# EAGLE board Pro_Micro-3.3V-Panel-v13 (EAGLE 6.5.0), part 1 of 5
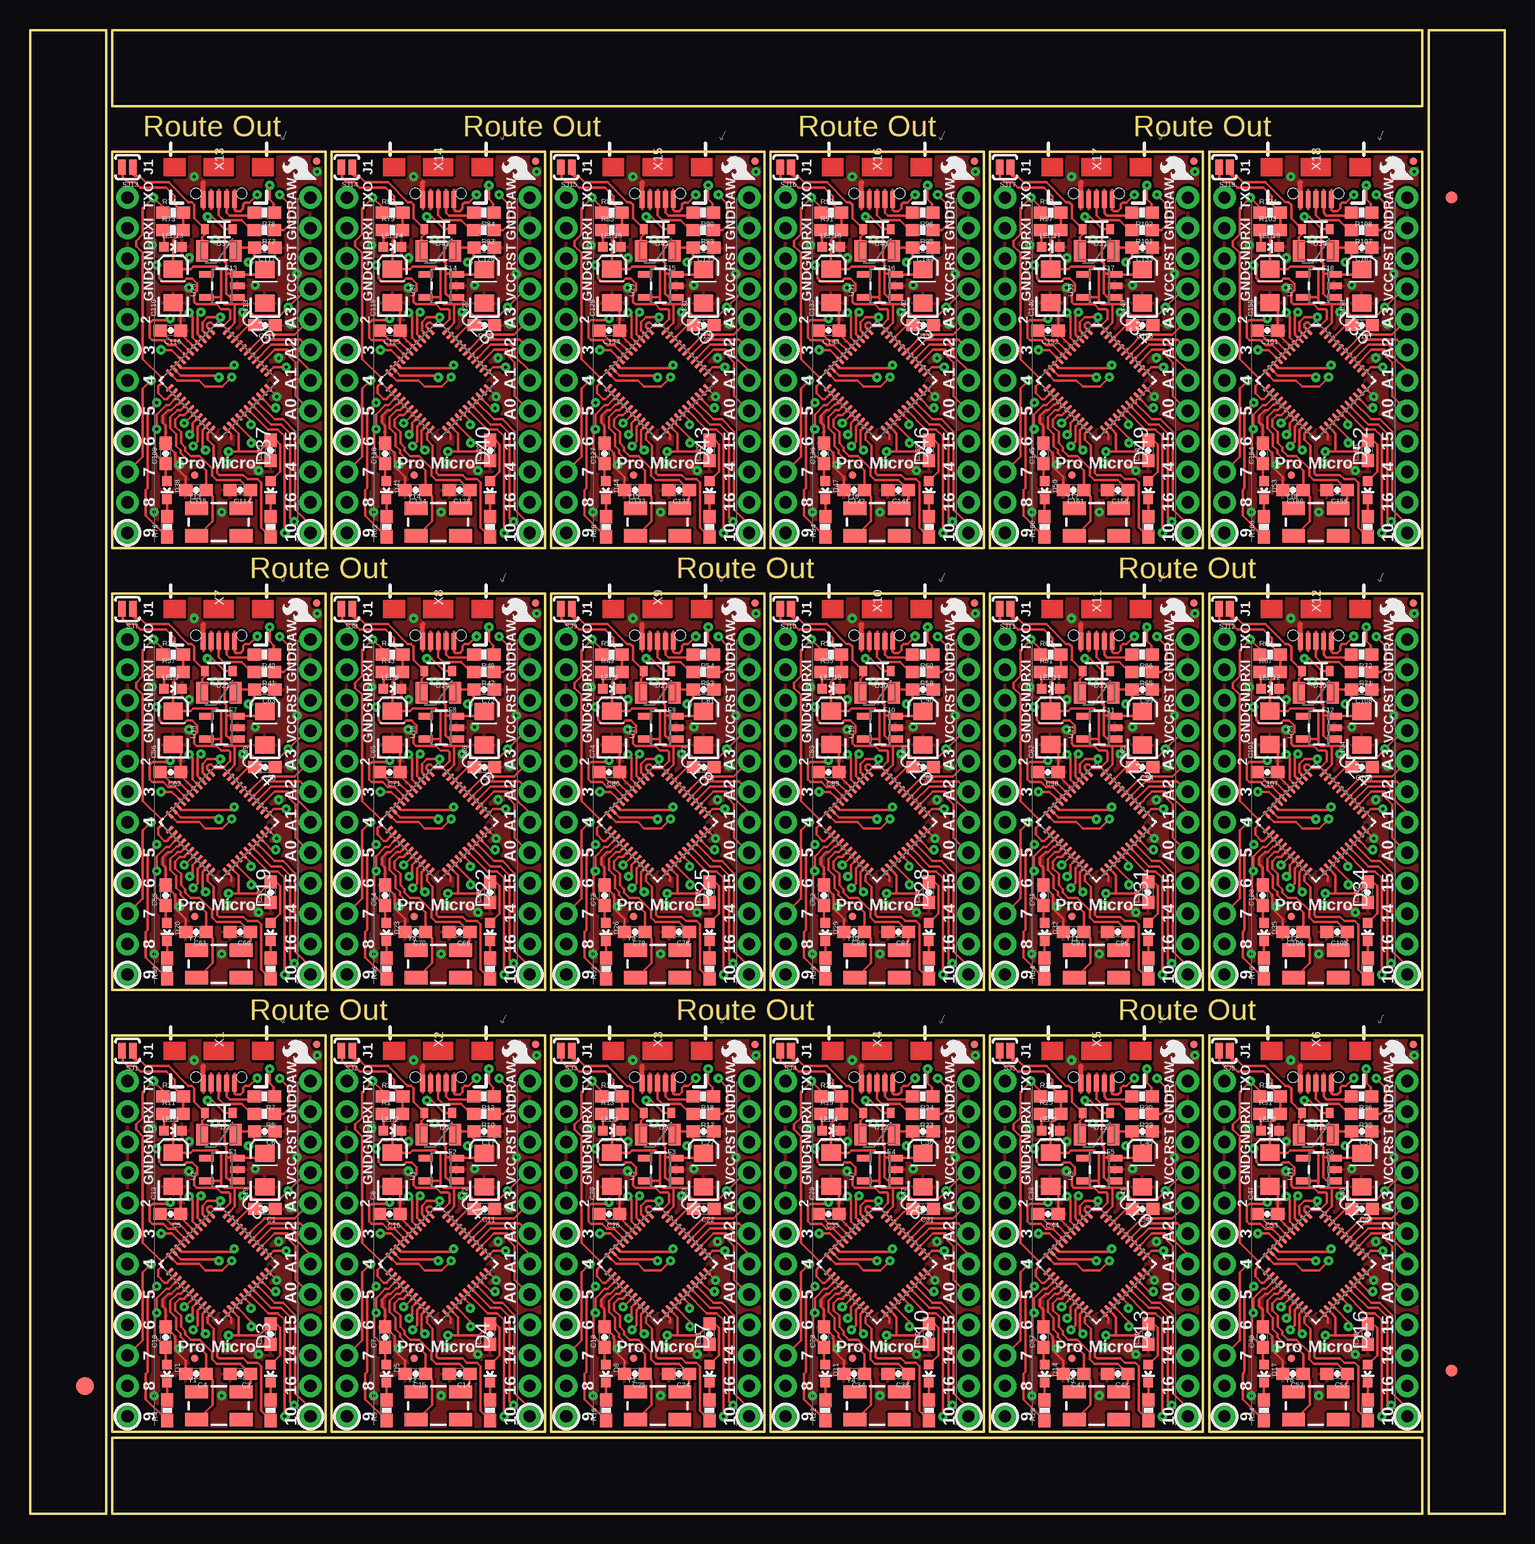
[diagram p0: board, top side]
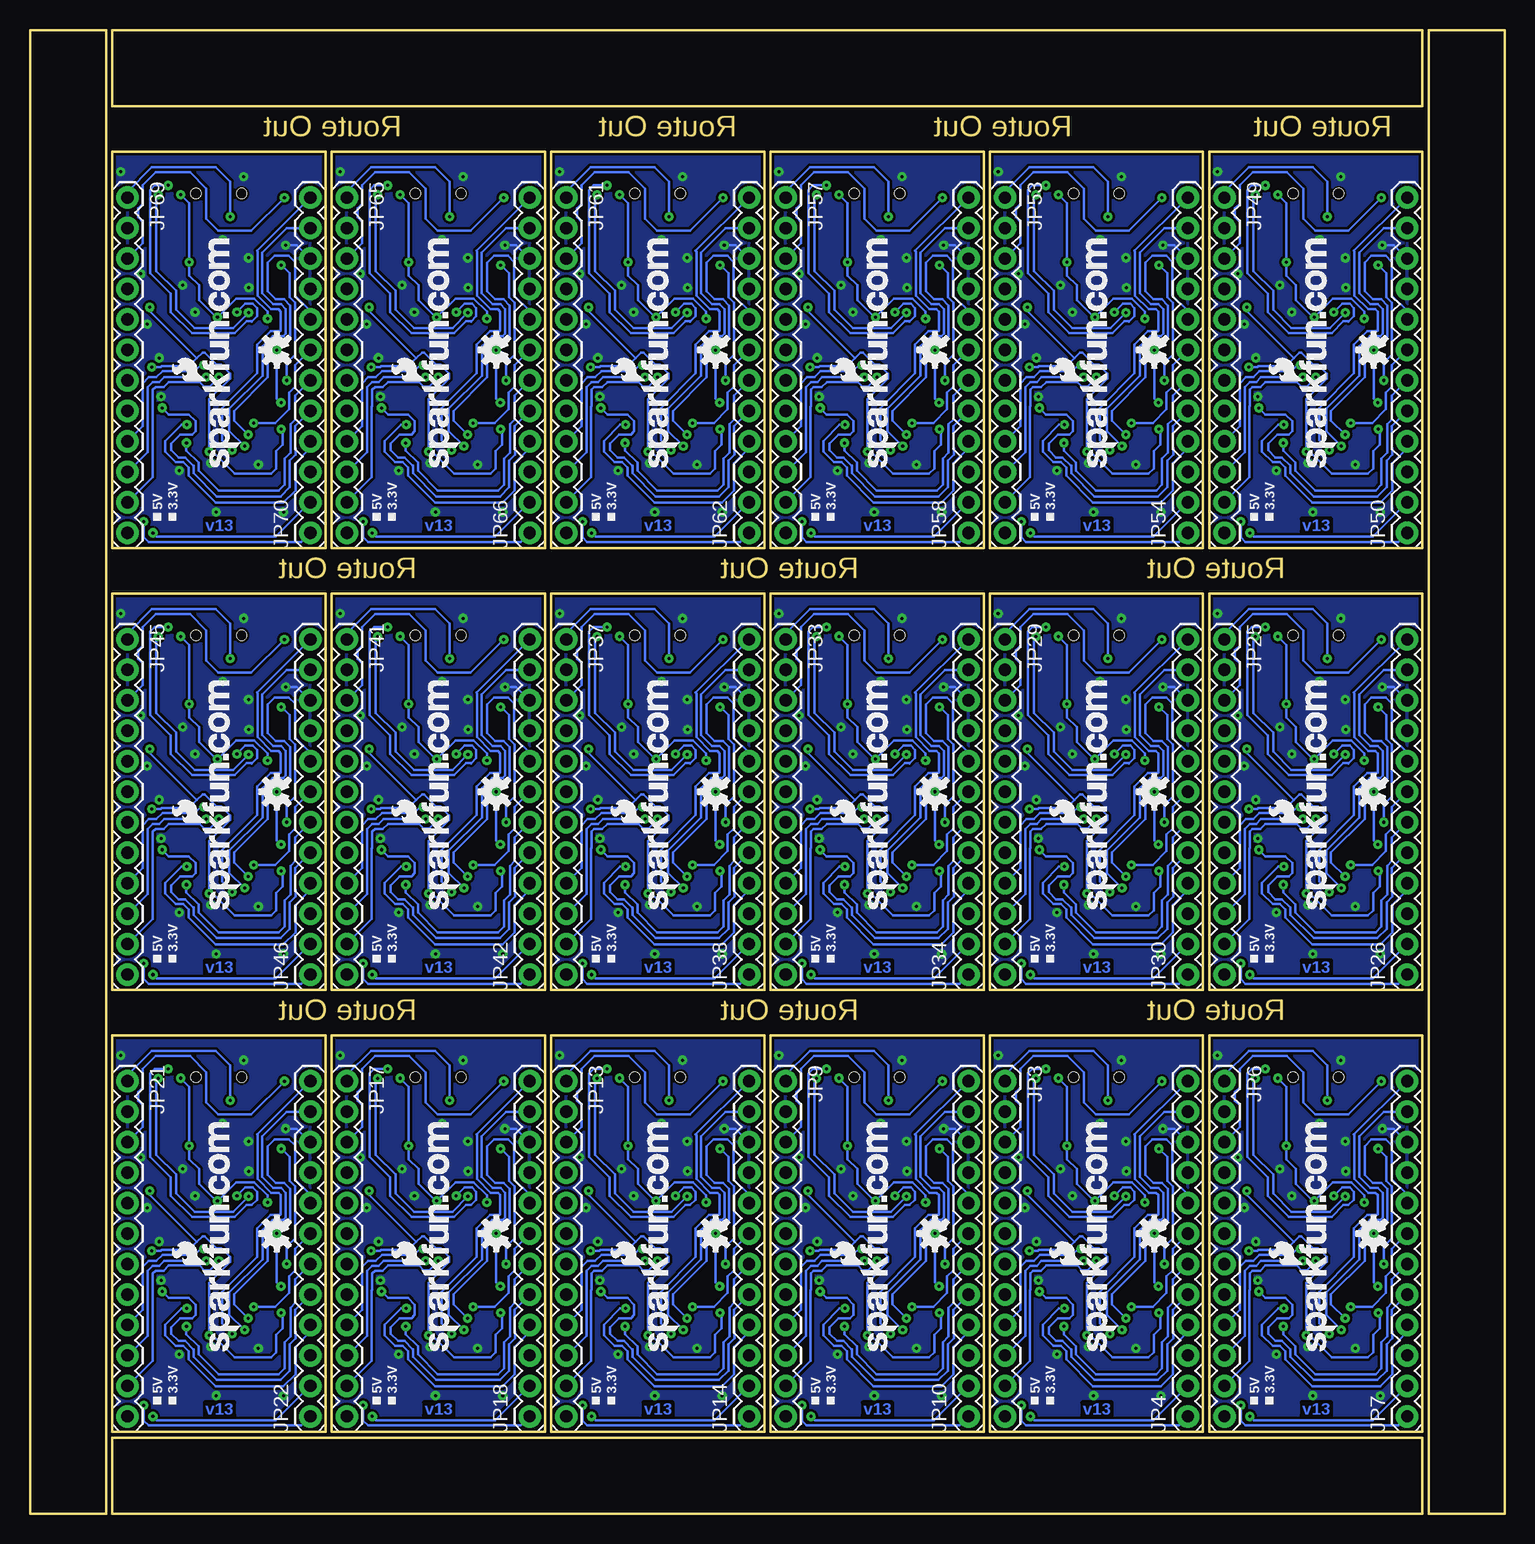
[diagram p1: board, bottom side, seen from below]

Size 122.94 x 123.7 mm. Coordinates in mm from the lower left corner, seen from the top.
Outline: 6.86,39.88 6.86,6.86 24.64,6.86 24.64,39.88 6.86,39.88
Outline: 25.15,39.88 25.15,6.86 42.93,6.86 42.93,39.88 25.15,39.88
Outline: 43.43,39.88 43.43,6.86 61.21,6.86 61.21,39.88 43.43,39.88
Outline: 61.72,39.88 61.72,6.86 79.5,6.86 79.5,39.88 61.72,39.88
Outline: 80.01,39.88 80.01,6.86 97.79,6.86 97.79,39.88 80.01,39.88
Outline: 98.3,39.88 98.3,6.86 116.08,6.86 116.08,39.88 98.3,39.88
Outline: 6.86,76.71 6.86,43.69 24.64,43.69 24.64,76.71 6.86,76.71
Outline: 25.15,76.71 25.15,43.69 42.93,43.69 42.93,76.71 25.15,76.71
Outline: 43.43,76.71 43.43,43.69 61.21,43.69 61.21,76.71 43.43,76.71
Outline: 61.72,76.71 61.72,43.69 79.5,43.69 79.5,76.71 61.72,76.71
Outline: 80.01,76.71 80.01,43.69 97.79,43.69 97.79,76.71 80.01,76.71
Outline: 98.3,76.71 98.3,43.69 116.08,43.69 116.08,76.71 98.3,76.71
Outline: 6.86,113.54 6.86,80.52 24.64,80.52 24.64,113.54 6.86,113.54
Outline: 25.15,113.54 25.15,80.52 42.93,80.52 42.93,113.54 25.15,113.54
Outline: 43.43,113.54 43.43,80.52 61.21,80.52 61.21,113.54 43.43,113.54
Outline: 61.72,113.54 61.72,80.52 79.5,80.52 79.5,113.54 61.72,113.54
Outline: 80.01,113.54 80.01,80.52 97.79,80.52 97.79,113.54 80.01,113.54
Outline: 98.3,113.54 98.3,80.52 116.08,80.52 116.08,113.54 98.3,113.54
Outline: 6.35,0 6.35,123.7 0,123.7 0,0 6.35,0
Outline: 6.86,0 116.08,0 116.08,6.35 6.86,6.35 6.86,0
Outline: 122.94,0 122.94,123.7 116.59,123.7 116.59,0 122.94,0
Outline: 6.86,117.35 116.08,117.35 116.08,123.7 6.86,123.7 6.86,117.35
Copper layers (1*16): Top 0.035mm / dielectric 1.5mm / Bottom 0.035mm
Design rules "SparkFun *": minimum track width 8mil, minimum drill 15mil, track to track 7mil, track to pad 7mil, pad to pad 7mil, via to via 7mil, smd to smd 7mil, copper to edge 7mil, drill to drill 7mil, minimum pad ring 12mil, minimum via ring 10mil, stop-mask expansion 4mil, vias tented up to drill 20mil, thermal gap 10mil
Net classes: 0 default: width 0.203 mm
tRestrict: area 16,16.4 to 16.2,16.6; area 19.9,20.4 to 20,20.5; area 12.3,17.1 to 19.4,24.4; area 34.3,16.4 to 34.5,16.6; area 38.2,20.4 to 38.3,20.5; area 30.6,17.1 to 37.7,24.4; area 52.6,16.4 to 52.8,16.6; area 56.5,20.4 to 56.6,20.5; area 48.9,17.1 to 56,24.4; area 70.9,16.4 to 71.1,16.6; area 74.8,20.4 to 74.9,20.5; area 67.2,17.1 to 74.3,24.4; area 89.2,16.4 to 89.3,16.6; area 93.1,20.4 to 93.2,20.5; area 85.5,17.1 to 92.6,24.4; area 107.4,16.4 to 107.6,16.6; area 111.4,20.4 to 111.4,20.5; area 103.7,17.1 to 110.9,24.4; area 16,53.3 to 16.2,53.4; area 19.9,57.3 to 20,57.3; area 12.3,54 to 19.4,61.3; area 34.3,53.3 to 34.5,53.4; area 38.2,57.3 to 38.3,57.3; area 30.6,54 to 37.7,61.3; area 52.6,53.3 to 52.8,53.4; area 56.5,57.3 to 56.6,57.3; area 48.9,54 to 56,61.3; area 70.9,53.3 to 71.1,53.4; area 74.8,57.3 to 74.9,57.3; area 67.2,54 to 74.3,61.3; area 89.2,53.3 to 89.3,53.4; area 93.1,57.3 to 93.2,57.3; area 85.5,54 to 92.6,61.3; area 107.4,53.3 to 107.6,53.4; area 111.4,57.3 to 111.4,57.3; area 103.7,54 to 110.9,61.3; area 16,90.1 to 16.2,90.2; area 19.9,94.1 to 20,94.2; area 12.3,90.8 to 19.4,98.1; area 34.3,90.1 to 34.5,90.2; area 38.2,94.1 to 38.3,94.2; area 30.6,90.8 to 37.7,98.1; area 52.6,90.1 to 52.8,90.2; area 56.5,94.1 to 56.6,94.2; area 48.9,90.8 to 56,98.1; area 70.9,90.1 to 71.1,90.2; area 74.8,94.1 to 74.9,94.2; area 67.2,90.8 to 74.3,98.1; area 89.2,90.1 to 89.3,90.2; area 93.1,94.1 to 93.2,94.2; area 85.5,90.8 to 92.6,98.1; area 107.4,90.1 to 107.6,90.2; area 111.4,94.1 to 111.4,94.2; area 103.7,90.8 to 110.9,98.1

## Footprints (pad centres in the part's own frame; a part is rotated, then mirrored left to right if it is on the bottom)
0603-CAP = smd 1.1 x 1: 1 -0.85,0; 2 0.85,0
EIA3216 = smd 1.4 x 1.6: A 1.4,0; C -1.4,0
LED-0603 = smd 0.8 x 0.8: A 0,-0.75; C 0,0.75
SOD-323 = smd 0.63 x 0.83: 1 -1.15,0; 2 1.15,0
FIDUCIAL-1.5X3 = smd 1.5 x 1.5: 1 0,0
FIDUCIAL-1X2 = smd 1 x 1: 1 0,0
PTC-1206 = smd 1 x 1.8: 1 -1.4,0; 2 1.4,0
MICRO-FIDUCIAL = smd 0.635 x 0.635: 1 0,0
1X12 = drill 1.016 pad 1.88: 1 0,0; 2 2.54,0; 3 5.08,0; 4 7.62,0; 5 10.16,0; 6 12.7,0; 7 15.24,0; 8 17.78,0; 9 20.32,0; 10 22.86,0; 11 25.4,0; 12 27.94,0
0603-RES = smd 1.1 x 1: 1 -0.85,0; 2 0.85,0
SJ_2S-NO = smd 0.635 x 1.27: 1 -0.45,0; 2 0.45,0
SOT23-5 = smd 0.55 x 1.2: 1 -0.95,-1.3; 2 0,-1.3; 3 0.95,-1.3; 4 0.95,1.3; 5 -0.95,1.3
QFN-44-NOPAD_1:1-LESS_PASTE = smd 0.8 x 0.3: 1 -3.337,2.458; 2 -3.337,1.958; 3 -3.337,1.479; 4 -3.337,0.979; 5 -3.337,0.5; 6 -3.337,0; 7 -3.337,-0.5; 8 -3.337,-0.979; 9 -3.337,-1.479; 10 -3.337,-1.958; 11 -3.337,-2.458; 23 3.337,-2.458; 24 3.337,-1.958; 25 3.337,-1.479; 26 3.337,-0.979; 27 3.337,-0.5; 28 3.337,0; 29 3.337,0.5; 30 3.337,0.979; 31 3.337,1.479; 32 3.337,1.958; 33 3.337,2.458 | smd 0.3 x 0.8: 12 -2.458,-3.337; 13 -1.958,-3.337; 14 -1.479,-3.337; 15 -0.979,-3.337; 16 -0.5,-3.337; 17 0,-3.337; 18 0.5,-3.337; 19 0.979,-3.337; 20 1.479,-3.337; 21 1.958,-3.337; 22 2.458,-3.337; 34 2.458,3.337; 35 1.958,3.337; 36 1.479,3.337; 37 0.979,3.337; 38 0.5,3.337; 39 0,3.337; 40 -0.5,3.337; 41 -0.979,3.337; 42 -1.479,3.337; 43 -1.958,3.337; 44 -2.458,3.337
USB-AB-MICRO-SMD-V03-IN&OUT = smd 1.4 x 0.4: D+1 2.7,0; D-1 2.7,0.65; GND1 2.7,-1.3; ID1 2.7,-0.65; VBUS1 2.7,1.3 | hole 0.85: 2.2,1.9; 2.2,-1.9
CRYSTAL-SMD-5X3 = smd 1.9 x 1.1: 1 -1.85,-1.15; 2 1.85,-1.15; 3 1.85,1.15; 4 -1.85,1.15

## Placement (x,y rotation side)
C1  0.1uF  [0603-CAP]  19.6,25.42 180 top
C2  22pF  [0603-CAP]  17.53,11.68 180 top
C3  0.1uF  [0603-CAP]  20.07,14.99 90 top
C4  22pF  [0603-CAP]  13.84,11.68 180 top
C5  1uF  [0603-CAP]  11.71,24.99 180 top
C6  1uF  [0603-CAP]  19.57,31.89 180 top
C7  1uF  [0603-CAP]  29.6,14.73 90 top
C8  10uF  [EIA3216]  30.21,28.71 90 top
C9  0.1uF  [0603-CAP]  38.35,14.99 90 top
C10  1uF  [0603-CAP]  11.32,14.73 90 top
C11  0.1uF  [0603-CAP]  37.88,25.42 180 top
C12  10uF  [EIA3216]  37.87,28.66 90 top
C13  10uF  [EIA3216]  11.93,28.71 90 top
C14  22pF  [0603-CAP]  35.81,11.68 180 top
C15  22pF  [0603-CAP]  32.13,11.68 180 top
C16  1uF  [0603-CAP]  30,24.99 180 top
C17  1uF  [0603-CAP]  37.86,31.89 180 top
C18  1uF  [0603-CAP]  47.89,14.73 90 top
C19  10uF  [EIA3216]  19.58,28.66 90 top
C20  10uF  [EIA3216]  48.5,28.71 90 top
C21  0.1uF  [0603-CAP]  56.64,14.99 90 top
C22  0.1uF  [0603-CAP]  56.17,25.42 180 top
C23  10uF  [EIA3216]  56.16,28.66 90 top
C24  22pF  [0603-CAP]  54.1,11.68 180 top
C25  22pF  [0603-CAP]  50.42,11.68 180 top
C26  1uF  [0603-CAP]  48.29,24.99 180 top
C27  1uF  [0603-CAP]  56.15,31.89 180 top
C28  1uF  [0603-CAP]  66.18,14.73 90 top
C29  10uF  [EIA3216]  66.79,28.71 90 top
C30  0.1uF  [0603-CAP]  74.93,14.99 90 top
C31  0.1uF  [0603-CAP]  74.46,25.42 180 top
C32  10uF  [EIA3216]  74.44,28.66 90 top
C33  22pF  [0603-CAP]  72.39,11.68 180 top
C34  22pF  [0603-CAP]  68.71,11.68 180 top
C35  1uF  [0603-CAP]  66.58,24.99 180 top
C36  1uF  [0603-CAP]  74.43,31.89 180 top
C37  1uF  [0603-CAP]  84.47,14.73 90 top
C38  10uF  [EIA3216]  85.08,28.71 90 top
C39  0.1uF  [0603-CAP]  93.22,14.99 90 top
C40  0.1uF  [0603-CAP]  92.75,25.42 180 top
C41  10uF  [EIA3216]  92.73,28.66 90 top
C42  22pF  [0603-CAP]  90.68,11.68 180 top
C43  22pF  [0603-CAP]  87,11.68 180 top
C44  1uF  [0603-CAP]  84.86,24.99 180 top
C45  1uF  [0603-CAP]  92.72,31.89 180 top
C46  1uF  [0603-CAP]  102.76,14.73 90 top
C47  10uF  [EIA3216]  103.37,28.71 90 top
C48  0.1uF  [0603-CAP]  111.51,14.99 90 top
C49  0.1uF  [0603-CAP]  111.04,25.42 180 top
C50  10uF  [EIA3216]  111.02,28.66 90 top
C51  22pF  [0603-CAP]  108.97,11.68 180 top
C52  22pF  [0603-CAP]  105.28,11.68 180 top
C53  1uF  [0603-CAP]  103.15,24.99 180 top
C54  1uF  [0603-CAP]  111.01,31.89 180 top
C55  1uF  [0603-CAP]  11.32,51.56 90 top
C56  10uF  [EIA3216]  11.93,65.54 90 top
C57  0.1uF  [0603-CAP]  20.07,51.82 90 top
C58  0.1uF  [0603-CAP]  19.6,62.25 180 top
C59  10uF  [EIA3216]  19.58,65.49 90 top
C60  22pF  [0603-CAP]  17.53,48.51 180 top
C61  22pF  [0603-CAP]  13.84,48.51 180 top
C62  1uF  [0603-CAP]  11.71,61.82 180 top
C63  1uF  [0603-CAP]  19.57,68.72 180 top
C64  1uF  [0603-CAP]  29.6,51.56 90 top
C65  10uF  [EIA3216]  30.21,65.54 90 top
C66  0.1uF  [0603-CAP]  38.35,51.82 90 top
C67  0.1uF  [0603-CAP]  37.88,62.25 180 top
C68  10uF  [EIA3216]  37.87,65.49 90 top
C69  22pF  [0603-CAP]  35.81,48.51 180 top
C70  22pF  [0603-CAP]  32.13,48.51 180 top
C71  1uF  [0603-CAP]  30,61.82 180 top
C72  1uF  [0603-CAP]  37.86,68.72 180 top
C73  1uF  [0603-CAP]  47.89,51.56 90 top
C74  10uF  [EIA3216]  48.5,65.54 90 top
C75  0.1uF  [0603-CAP]  56.64,51.82 90 top
C76  0.1uF  [0603-CAP]  56.17,62.25 180 top
C77  10uF  [EIA3216]  56.16,65.49 90 top
C78  22pF  [0603-CAP]  54.1,48.51 180 top
C79  22pF  [0603-CAP]  50.42,48.51 180 top
C80  1uF  [0603-CAP]  48.29,61.82 180 top
C81  1uF  [0603-CAP]  56.15,68.72 180 top
C82  1uF  [0603-CAP]  66.18,51.56 90 top
C83  10uF  [EIA3216]  66.79,65.54 90 top
C84  0.1uF  [0603-CAP]  74.93,51.82 90 top
C85  0.1uF  [0603-CAP]  74.46,62.25 180 top
C86  10uF  [EIA3216]  74.44,65.49 90 top
C87  22pF  [0603-CAP]  72.39,48.51 180 top
C88  22pF  [0603-CAP]  68.71,48.51 180 top
C89  1uF  [0603-CAP]  66.58,61.82 180 top
C90  1uF  [0603-CAP]  74.43,68.72 180 top
C91  1uF  [0603-CAP]  84.47,51.56 90 top
C92  10uF  [EIA3216]  85.08,65.54 90 top
C93  0.1uF  [0603-CAP]  93.22,51.82 90 top
C94  0.1uF  [0603-CAP]  92.75,62.25 180 top
C95  10uF  [EIA3216]  92.73,65.49 90 top
C96  22pF  [0603-CAP]  90.68,48.51 180 top
C97  22pF  [0603-CAP]  87,48.51 180 top
C98  1uF  [0603-CAP]  84.86,61.82 180 top
C99  1uF  [0603-CAP]  92.72,68.72 180 top
C100  1uF  [0603-CAP]  102.76,51.56 90 top
C101  10uF  [EIA3216]  103.37,65.54 90 top
C102  0.1uF  [0603-CAP]  111.51,51.82 90 top
C103  0.1uF  [0603-CAP]  111.04,62.25 180 top
C104  10uF  [EIA3216]  111.02,65.49 90 top
C105  22pF  [0603-CAP]  108.97,48.51 180 top
C106  22pF  [0603-CAP]  105.28,48.51 180 top
C107  1uF  [0603-CAP]  103.15,61.82 180 top
C108  1uF  [0603-CAP]  111.01,68.72 180 top
C109  1uF  [0603-CAP]  11.32,88.39 90 top
C110  10uF  [EIA3216]  11.93,102.37 90 top
C111  0.1uF  [0603-CAP]  20.07,88.65 90 top
C112  0.1uF  [0603-CAP]  19.6,99.08 180 top
C113  10uF  [EIA3216]  19.58,102.32 90 top
C114  22pF  [0603-CAP]  17.53,85.34 180 top
C115  22pF  [0603-CAP]  13.84,85.34 180 top
C116  1uF  [0603-CAP]  11.71,98.65 180 top
C117  1uF  [0603-CAP]  19.57,105.55 180 top
C118  1uF  [0603-CAP]  29.6,88.39 90 top
C119  10uF  [EIA3216]  30.21,102.37 90 top
C120  0.1uF  [0603-CAP]  38.35,88.65 90 top
C121  0.1uF  [0603-CAP]  37.88,99.08 180 top
C122  10uF  [EIA3216]  37.87,102.32 90 top
C123  22pF  [0603-CAP]  35.81,85.34 180 top
C124  22pF  [0603-CAP]  32.13,85.34 180 top
C125  1uF  [0603-CAP]  30,98.65 180 top
C126  1uF  [0603-CAP]  37.86,105.55 180 top
C127  1uF  [0603-CAP]  47.89,88.39 90 top
C128  10uF  [EIA3216]  48.5,102.37 90 top
C129  0.1uF  [0603-CAP]  56.64,88.65 90 top
C130  0.1uF  [0603-CAP]  56.17,99.08 180 top
C131  10uF  [EIA3216]  56.16,102.32 90 top
C132  22pF  [0603-CAP]  54.1,85.34 180 top
C133  22pF  [0603-CAP]  50.42,85.34 180 top
C134  1uF  [0603-CAP]  48.29,98.65 180 top
C135  1uF  [0603-CAP]  56.15,105.55 180 top
C136  1uF  [0603-CAP]  66.18,88.39 90 top
C137  10uF  [EIA3216]  66.79,102.37 90 top
C138  0.1uF  [0603-CAP]  74.93,88.65 90 top
C139  0.1uF  [0603-CAP]  74.46,99.08 180 top
C140  10uF  [EIA3216]  74.44,102.32 90 top
C141  22pF  [0603-CAP]  72.39,85.34 180 top
C142  22pF  [0603-CAP]  68.71,85.34 180 top
C143  1uF  [0603-CAP]  66.58,98.65 180 top
C144  1uF  [0603-CAP]  74.43,105.55 180 top
C145  1uF  [0603-CAP]  84.47,88.39 90 top
C146  10uF  [EIA3216]  85.08,102.37 90 top
C147  0.1uF  [0603-CAP]  93.22,88.65 90 top
C148  0.1uF  [0603-CAP]  92.75,99.08 180 top
C149  10uF  [EIA3216]  92.73,102.32 90 top
C150  22pF  [0603-CAP]  90.68,85.34 180 top
C151  22pF  [0603-CAP]  87,85.34 180 top
C152  1uF  [0603-CAP]  84.86,98.65 180 top
C153  1uF  [0603-CAP]  92.72,105.55 180 top
C154  1uF  [0603-CAP]  102.76,88.39 90 top
C155  10uF  [EIA3216]  103.37,102.37 90 top
C156  0.1uF  [0603-CAP]  111.51,88.65 90 top
C157  0.1uF  [0603-CAP]  111.04,99.08 180 top
C158  10uF  [EIA3216]  111.02,102.32 90 top
C159  22pF  [0603-CAP]  108.97,85.34 180 top
C160  22pF  [0603-CAP]  105.28,85.34 180 top
C161  1uF  [0603-CAP]  103.15,98.65 180 top
C162  1uF  [0603-CAP]  111.01,105.55 180 top
D1  Yellow  [LED-0603]  11.43,11.68 180 top
D2  [SOD-323]  15.75,33.43 180 top
D3  Green  [LED-0603]  20.07,11.68 180 top
D4  Green  [LED-0603]  38.35,11.68 180 top
D5  Yellow  [LED-0603]  29.72,11.68 180 top
D6  [SOD-323]  34.04,33.43 180 top
D7  Green  [LED-0603]  56.64,11.68 180 top
D8  Yellow  [LED-0603]  48.01,11.68 180 top
D9  [SOD-323]  52.32,33.43 180 top
D10  Green  [LED-0603]  74.93,11.68 180 top
D11  Yellow  [LED-0603]  66.29,11.68 180 top
D12  [SOD-323]  70.61,33.43 180 top
D13  Green  [LED-0603]  93.22,11.68 180 top
D14  Yellow  [LED-0603]  84.58,11.68 180 top
D15  [SOD-323]  88.9,33.43 180 top
D16  Green  [LED-0603]  111.51,11.68 180 top
D17  Yellow  [LED-0603]  102.87,11.68 180 top
D18  [SOD-323]  107.19,33.43 180 top
D19  Green  [LED-0603]  20.07,48.51 180 top
D20  Yellow  [LED-0603]  11.43,48.51 180 top
D21  [SOD-323]  15.75,70.26 180 top
D22  Green  [LED-0603]  38.35,48.51 180 top
D23  Yellow  [LED-0603]  29.72,48.51 180 top
D24  [SOD-323]  34.04,70.26 180 top
D25  Green  [LED-0603]  56.64,48.51 180 top
D26  Yellow  [LED-0603]  48.01,48.51 180 top
D27  [SOD-323]  52.32,70.26 180 top
D28  Green  [LED-0603]  74.93,48.51 180 top
D29  Yellow  [LED-0603]  66.29,48.51 180 top
D30  [SOD-323]  70.61,70.26 180 top
D31  Green  [LED-0603]  93.22,48.51 180 top
D32  Yellow  [LED-0603]  84.58,48.51 180 top
D33  [SOD-323]  88.9,70.26 180 top
D34  Green  [LED-0603]  111.51,48.51 180 top
D35  Yellow  [LED-0603]  102.87,48.51 180 top
D36  [SOD-323]  107.19,70.26 180 top
D37  Green  [LED-0603]  20.07,85.34 180 top
D38  Yellow  [LED-0603]  11.43,85.34 180 top
D39  [SOD-323]  15.75,107.09 180 top
D40  Green  [LED-0603]  38.35,85.34 180 top
D41  Yellow  [LED-0603]  29.72,85.34 180 top
D42  [SOD-323]  34.04,107.09 180 top
D43  Green  [LED-0603]  56.64,85.34 180 top
D44  Yellow  [LED-0603]  48.01,85.34 180 top
D45  [SOD-323]  52.32,107.09 180 top
D46  Green  [LED-0603]  74.93,85.34 180 top
D47  Yellow  [LED-0603]  66.29,85.34 180 top
D48  [SOD-323]  70.61,107.09 180 top
D49  Green  [LED-0603]  93.22,85.34 180 top
D50  Yellow  [LED-0603]  84.58,85.34 180 top
D51  [SOD-323]  88.9,107.09 180 top
D52  Green  [LED-0603]  111.51,85.34 180 top
D53  Yellow  [LED-0603]  102.87,85.34 180 top
D54  [SOD-323]  107.19,107.09 180 top
E$1  [FIDUCIAL-1.5X3]  4.57,10.67 0 top
E$4  [FIDUCIAL-1X2]  118.49,11.94 0 top
E$8  [FIDUCIAL-1X2]  118.49,109.73 180 top
F1  500mA  [PTC-1206]  15.75,31.62 180 top
F2  500mA  [PTC-1206]  34.04,31.62 180 top
F3  500mA  [PTC-1206]  52.32,31.62 180 top
F4  500mA  [PTC-1206]  70.61,31.62 180 top
F5  500mA  [PTC-1206]  88.9,31.62 180 top
F6  500mA  [PTC-1206]  107.19,31.62 180 top
F7  500mA  [PTC-1206]  15.75,68.45 180 top
F8  500mA  [PTC-1206]  34.04,68.45 180 top
F9  500mA  [PTC-1206]  52.32,68.45 180 top
F10  500mA  [PTC-1206]  70.61,68.45 180 top
F11  500mA  [PTC-1206]  88.9,68.45 180 top
F12  500mA  [PTC-1206]  107.19,68.45 180 top
F13  500mA  [PTC-1206]  15.75,105.28 180 top
F14  500mA  [PTC-1206]  34.04,105.28 180 top
F15  500mA  [PTC-1206]  52.32,105.28 180 top
F16  500mA  [PTC-1206]  70.61,105.28 180 top
F17  500mA  [PTC-1206]  88.9,105.28 180 top
F18  500mA  [PTC-1206]  107.19,105.28 180 top
JP1  FIDUCIALUFIDUCIAL  [MICRO-FIDUCIAL]  13.72,12.95 0 top
JP2  FIDUCIALUFIDUCIAL  [MICRO-FIDUCIAL]  23.88,39.12 0 top
JP3  [1X12]  41.66,36.07 270 bottom
JP4  [1X12]  26.42,8.13 90 bottom
JP5  FIDUCIALUFIDUCIAL  [MICRO-FIDUCIAL]  32,12.95 0 top
JP6  [1X12]  23.37,36.07 270 bottom
JP7  [1X12]  8.13,8.13 90 bottom
JP8  FIDUCIALUFIDUCIAL  [MICRO-FIDUCIAL]  42.16,39.12 0 top
JP9  [1X12]  59.94,36.07 270 bottom
JP10  [1X12]  44.7,8.13 90 bottom
JP11  FIDUCIALUFIDUCIAL  [MICRO-FIDUCIAL]  50.29,12.95 0 top
JP12  FIDUCIALUFIDUCIAL  [MICRO-FIDUCIAL]  60.45,39.12 0 top
JP13  [1X12]  78.23,36.07 270 bottom
JP14  [1X12]  62.99,8.13 90 bottom
JP15  FIDUCIALUFIDUCIAL  [MICRO-FIDUCIAL]  68.58,12.95 0 top
JP16  FIDUCIALUFIDUCIAL  [MICRO-FIDUCIAL]  78.74,39.12 0 top
JP17  [1X12]  96.52,36.07 270 bottom
JP18  [1X12]  81.28,8.13 90 bottom
JP19  FIDUCIALUFIDUCIAL  [MICRO-FIDUCIAL]  86.87,12.95 0 top
JP20  FIDUCIALUFIDUCIAL  [MICRO-FIDUCIAL]  97.03,39.12 0 top
JP21  [1X12]  114.81,36.07 270 bottom
JP22  [1X12]  99.57,8.13 90 bottom
JP23  FIDUCIALUFIDUCIAL  [MICRO-FIDUCIAL]  105.16,12.95 0 top
JP24  FIDUCIALUFIDUCIAL  [MICRO-FIDUCIAL]  115.32,39.12 0 top
JP25  [1X12]  23.37,72.9 270 bottom
JP26  [1X12]  8.13,44.96 90 bottom
JP27  FIDUCIALUFIDUCIAL  [MICRO-FIDUCIAL]  13.72,49.78 0 top
JP28  FIDUCIALUFIDUCIAL  [MICRO-FIDUCIAL]  23.88,75.95 0 top
JP29  [1X12]  41.66,72.9 270 bottom
JP30  [1X12]  26.42,44.96 90 bottom
JP31  FIDUCIALUFIDUCIAL  [MICRO-FIDUCIAL]  32,49.78 0 top
JP32  FIDUCIALUFIDUCIAL  [MICRO-FIDUCIAL]  42.16,75.95 0 top
JP33  [1X12]  59.94,72.9 270 bottom
JP34  [1X12]  44.7,44.96 90 bottom
JP35  FIDUCIALUFIDUCIAL  [MICRO-FIDUCIAL]  50.29,49.78 0 top
JP36  FIDUCIALUFIDUCIAL  [MICRO-FIDUCIAL]  60.45,75.95 0 top
JP37  [1X12]  78.23,72.9 270 bottom
JP38  [1X12]  62.99,44.96 90 bottom
JP39  FIDUCIALUFIDUCIAL  [MICRO-FIDUCIAL]  68.58,49.78 0 top
JP40  FIDUCIALUFIDUCIAL  [MICRO-FIDUCIAL]  78.74,75.95 0 top
JP41  [1X12]  96.52,72.9 270 bottom
JP42  [1X12]  81.28,44.96 90 bottom
JP43  FIDUCIALUFIDUCIAL  [MICRO-FIDUCIAL]  86.87,49.78 0 top
JP44  FIDUCIALUFIDUCIAL  [MICRO-FIDUCIAL]  97.03,75.95 0 top
JP45  [1X12]  114.81,72.9 270 bottom
JP46  [1X12]  99.57,44.96 90 bottom
JP47  FIDUCIALUFIDUCIAL  [MICRO-FIDUCIAL]  105.16,49.78 0 top
JP48  FIDUCIALUFIDUCIAL  [MICRO-FIDUCIAL]  115.32,75.95 0 top
JP49  [1X12]  23.37,109.73 270 bottom
JP50  [1X12]  8.13,81.79 90 bottom
JP51  FIDUCIALUFIDUCIAL  [MICRO-FIDUCIAL]  13.72,86.61 0 top
JP52  FIDUCIALUFIDUCIAL  [MICRO-FIDUCIAL]  23.88,112.78 0 top
JP53  [1X12]  41.66,109.73 270 bottom
JP54  [1X12]  26.42,81.79 90 bottom
JP55  FIDUCIALUFIDUCIAL  [MICRO-FIDUCIAL]  32,86.61 0 top
JP56  FIDUCIALUFIDUCIAL  [MICRO-FIDUCIAL]  42.16,112.78 0 top
JP57  [1X12]  59.94,109.73 270 bottom
JP58  [1X12]  44.7,81.79 90 bottom
JP59  FIDUCIALUFIDUCIAL  [MICRO-FIDUCIAL]  50.29,86.61 0 top
JP60  FIDUCIALUFIDUCIAL  [MICRO-FIDUCIAL]  60.45,112.78 0 top
JP61  [1X12]  78.23,109.73 270 bottom
JP62  [1X12]  62.99,81.79 90 bottom
JP63  FIDUCIALUFIDUCIAL  [MICRO-FIDUCIAL]  68.58,86.61 0 top
JP64  FIDUCIALUFIDUCIAL  [MICRO-FIDUCIAL]  78.74,112.78 0 top
JP65  [1X12]  96.52,109.73 270 bottom
JP66  [1X12]  81.28,81.79 90 bottom
JP67  FIDUCIALUFIDUCIAL  [MICRO-FIDUCIAL]  86.87,86.61 0 top
JP68  FIDUCIALUFIDUCIAL  [MICRO-FIDUCIAL]  97.03,112.78 0 top
JP69  [1X12]  114.81,109.73 270 bottom
JP70  [1X12]  99.57,81.79 90 bottom
JP71  FIDUCIALUFIDUCIAL  [MICRO-FIDUCIAL]  105.16,86.61 0 top
JP72  FIDUCIALUFIDUCIAL  [MICRO-FIDUCIAL]  115.32,112.78 0 top
LED1  Red  [LED-0603]  11.93,31.96 270 top
LED2  Red  [LED-0603]  30.21,31.96 270 top
LED3  Red  [LED-0603]  48.5,31.96 270 top
LED4  Red  [LED-0603]  66.79,31.96 270 top
LED5  Red  [LED-0603]  85.08,31.96 270 top
LED6  Red  [LED-0603]  103.37,31.96 270 top
LED7  Red  [LED-0603]  11.93,68.79 270 top
LED8  Red  [LED-0603]  30.21,68.79 270 top
LED9  Red  [LED-0603]  48.5,68.79 270 top
LED10  Red  [LED-0603]  66.79,68.79 270 top
LED11  Red  [LED-0603]  85.08,68.79 270 top
LED12  Red  [LED-0603]  103.37,68.79 270 top
LED13  Red  [LED-0603]  11.93,105.62 270 top
LED14  Red  [LED-0603]  30.21,105.62 270 top
LED15  Red  [LED-0603]  48.5,105.62 270 top
LED16  Red  [LED-0603]  66.79,105.62 270 top
LED17  Red  [LED-0603]  85.08,105.62 270 top
LED18  Red  [LED-0603]  103.37,105.62 270 top
R1  1K  [0603-RES]  30.21,33.36 0 top
R2  10K  [0603-RES]  11.94,34.8 0 top
R3  10K  [0603-RES]  30.23,34.8 0 top
R4  330  [0603-RES]  11.43,8.64 90 top
R5  22  [0603-RES]  19.56,33.35 180 top
R6  330  [0603-RES]  20.07,8.64 90 top
R7  22  [0603-RES]  19.56,34.8 180 top
R8  330  [0603-RES]  38.35,8.64 90 top
R9  330  [0603-RES]  29.72,8.64 90 top
R10  22  [0603-RES]  37.85,33.35 180 top
R11  1K  [0603-RES]  11.93,33.36 0 top
R12  22  [0603-RES]  37.85,34.8 180 top
R13  1K  [0603-RES]  48.5,33.36 0 top
R14  10K  [0603-RES]  48.51,34.8 0 top
R15  330  [0603-RES]  56.64,8.64 90 top
R16  330  [0603-RES]  48.01,8.64 90 top
R17  22  [0603-RES]  56.13,33.35 180 top
R18  22  [0603-RES]  56.13,34.8 180 top
R19  1K  [0603-RES]  66.79,33.36 0 top
R20  10K  [0603-RES]  66.8,34.8 0 top
R21  330  [0603-RES]  74.93,8.64 90 top
R22  330  [0603-RES]  66.29,8.64 90 top
R23  22  [0603-RES]  74.42,33.35 180 top
R24  22  [0603-RES]  74.42,34.8 180 top
R25  1K  [0603-RES]  85.08,33.36 0 top
R26  10K  [0603-RES]  85.09,34.8 0 top
R27  330  [0603-RES]  93.22,8.64 90 top
R28  330  [0603-RES]  84.58,8.64 90 top
R29  22  [0603-RES]  92.71,33.35 180 top
R30  22  [0603-RES]  92.71,34.8 180 top
R31  1K  [0603-RES]  103.37,33.36 0 top
R32  10K  [0603-RES]  103.38,34.8 0 top
R33  330  [0603-RES]  111.51,8.64 90 top
R34  330  [0603-RES]  102.87,8.64 90 top
R35  22  [0603-RES]  111,33.35 180 top
R36  22  [0603-RES]  111,34.8 180 top
R37  1K  [0603-RES]  11.93,70.19 0 top
R38  10K  [0603-RES]  11.94,71.63 0 top
R39  330  [0603-RES]  20.07,45.47 90 top
R40  330  [0603-RES]  11.43,45.47 90 top
R41  22  [0603-RES]  19.56,70.18 180 top
R42  22  [0603-RES]  19.56,71.63 180 top
R43  1K  [0603-RES]  30.21,70.19 0 top
R44  10K  [0603-RES]  30.23,71.63 0 top
R45  330  [0603-RES]  38.35,45.47 90 top
R46  330  [0603-RES]  29.72,45.47 90 top
R47  22  [0603-RES]  37.85,70.18 180 top
R48  22  [0603-RES]  37.85,71.63 180 top
R49  1K  [0603-RES]  48.5,70.19 0 top
R50  10K  [0603-RES]  48.51,71.63 0 top
R51  330  [0603-RES]  56.64,45.47 90 top
R52  330  [0603-RES]  48.01,45.47 90 top
R53  22  [0603-RES]  56.13,70.18 180 top
R54  22  [0603-RES]  56.13,71.63 180 top
R55  1K  [0603-RES]  66.79,70.19 0 top
R56  10K  [0603-RES]  66.8,71.63 0 top
R57  330  [0603-RES]  74.93,45.47 90 top
R58  330  [0603-RES]  66.29,45.47 90 top
R59  22  [0603-RES]  74.42,70.18 180 top
R60  22  [0603-RES]  74.42,71.63 180 top
R61  1K  [0603-RES]  85.08,70.19 0 top
R62  10K  [0603-RES]  85.09,71.63 0 top
R63  330  [0603-RES]  93.22,45.47 90 top
R64  330  [0603-RES]  84.58,45.47 90 top
R65  22  [0603-RES]  92.71,70.18 180 top
R66  22  [0603-RES]  92.71,71.63 180 top
R67  1K  [0603-RES]  103.37,70.19 0 top
R68  10K  [0603-RES]  103.38,71.63 0 top
R69  330  [0603-RES]  111.51,45.47 90 top
R70  330  [0603-RES]  102.87,45.47 90 top
R71  22  [0603-RES]  111,70.18 180 top
R72  22  [0603-RES]  111,71.63 180 top
R73  1K  [0603-RES]  11.93,107.02 0 top
R74  10K  [0603-RES]  11.94,108.46 0 top
R75  330  [0603-RES]  20.07,82.3 90 top
R76  330  [0603-RES]  11.43,82.3 90 top
R77  22  [0603-RES]  19.56,107.01 180 top
R78  22  [0603-RES]  19.56,108.46 180 top
R79  1K  [0603-RES]  30.21,107.02 0 top
R80  10K  [0603-RES]  30.23,108.46 0 top
R81  330  [0603-RES]  38.35,82.3 90 top
R82  330  [0603-RES]  29.72,82.3 90 top
R83  22  [0603-RES]  37.85,107.01 180 top
R84  22  [0603-RES]  37.85,108.46 180 top
R85  1K  [0603-RES]  48.5,107.02 0 top
R86  10K  [0603-RES]  48.51,108.46 0 top
R87  330  [0603-RES]  56.64,82.3 90 top
R88  330  [0603-RES]  48.01,82.3 90 top
R89  22  [0603-RES]  56.13,107.01 180 top
R90  22  [0603-RES]  56.13,108.46 180 top
R91  1K  [0603-RES]  66.79,107.02 0 top
R92  10K  [0603-RES]  66.8,108.46 0 top
R93  330  [0603-RES]  74.93,82.3 90 top
R94  330  [0603-RES]  66.29,82.3 90 top
R95  22  [0603-RES]  74.42,107.01 180 top
R96  22  [0603-RES]  74.42,108.46 180 top
R97  1K  [0603-RES]  85.08,107.02 0 top
R98  10K  [0603-RES]  85.09,108.46 0 top
R99  330  [0603-RES]  93.22,82.3 90 top
R100  330  [0603-RES]  84.58,82.3 90 top
R101  22  [0603-RES]  92.71,107.01 180 top
R102  22  [0603-RES]  92.71,108.46 180 top
R103  1K  [0603-RES]  103.37,107.02 0 top
R104  10K  [0603-RES]  103.38,108.46 0 top
R105  330  [0603-RES]  111.51,82.3 90 top
R106  330  [0603-RES]  102.87,82.3 90 top
R107  22  [0603-RES]  111,107.01 180 top
R108  22  [0603-RES]  111,108.46 180 top
SJ1  Closed for 5V Board  [SJ_2S-NO]  8.13,38.61 180 top
SJ2  Closed for 5V Board  [SJ_2S-NO]  26.42,38.61 180 top
SJ3  Closed for 5V Board  [SJ_2S-NO]  44.7,38.61 180 top
SJ4  Closed for 5V Board  [SJ_2S-NO]  62.99,38.61 180 top
SJ5  Closed for 5V Board  [SJ_2S-NO]  81.28,38.61 180 top
SJ6  Closed for 5V Board  [SJ_2S-NO]  99.57,38.61 180 top
SJ7  Closed for 5V Board  [SJ_2S-NO]  8.13,75.44 180 top
SJ8  Closed for 5V Board  [SJ_2S-NO]  26.42,75.44 180 top
SJ9  Closed for 5V Board  [SJ_2S-NO]  44.7,75.44 180 top
SJ10  Closed for 5V Board  [SJ_2S-NO]  62.99,75.44 180 top
SJ11  Closed for 5V Board  [SJ_2S-NO]  81.28,75.44 180 top
SJ12  Closed for 5V Board  [SJ_2S-NO]  99.57,75.44 180 top
SJ13  Closed for 5V Board  [SJ_2S-NO]  8.13,112.27 180 top
SJ14  Closed for 5V Board  [SJ_2S-NO]  26.42,112.27 180 top
SJ15  Closed for 5V Board  [SJ_2S-NO]  44.7,112.27 180 top
SJ16  Closed for 5V Board  [SJ_2S-NO]  62.99,112.27 180 top
SJ17  Closed for 5V Board  [SJ_2S-NO]  81.28,112.27 180 top
SJ18  Closed for 5V Board  [SJ_2S-NO]  99.57,112.27 180 top
U1  MIC5219  [SOT23-5]  34.28,28.71 90 top
U2  MIC5219  [SOT23-5]  15.99,28.71 90 top
U3  ATMEGA32U4  [QFN-44-NOPAD_1:1-LESS_PASTE]  15.75,20.83 315 top
U4  ATMEGA32U4  [QFN-44-NOPAD_1:1-LESS_PASTE]  34.04,20.83 315 top
U5  MIC5219  [SOT23-5]  52.57,28.71 90 top
U6  ATMEGA32U4  [QFN-44-NOPAD_1:1-LESS_PASTE]  52.32,20.83 315 top
U7  MIC5219  [SOT23-5]  70.86,28.71 90 top
U8  ATMEGA32U4  [QFN-44-NOPAD_1:1-LESS_PASTE]  70.61,20.83 315 top
U9  MIC5219  [SOT23-5]  89.15,28.71 90 top
U10  ATMEGA32U4  [QFN-44-NOPAD_1:1-LESS_PASTE]  88.9,20.83 315 top
U11  MIC5219  [SOT23-5]  107.43,28.71 90 top
U12  ATMEGA32U4  [QFN-44-NOPAD_1:1-LESS_PASTE]  107.19,20.83 315 top
U13  MIC5219  [SOT23-5]  15.99,65.54 90 top
U14  ATMEGA32U4  [QFN-44-NOPAD_1:1-LESS_PASTE]  15.75,57.66 315 top
U15  MIC5219  [SOT23-5]  34.28,65.54 90 top
U16  ATMEGA32U4  [QFN-44-NOPAD_1:1-LESS_PASTE]  34.04,57.66 315 top
U17  MIC5219  [SOT23-5]  52.57,65.54 90 top
U18  ATMEGA32U4  [QFN-44-NOPAD_1:1-LESS_PASTE]  52.32,57.66 315 top
U19  MIC5219  [SOT23-5]  70.86,65.54 90 top
U20  ATMEGA32U4  [QFN-44-NOPAD_1:1-LESS_PASTE]  70.61,57.66 315 top
U21  MIC5219  [SOT23-5]  89.15,65.54 90 top
U22  ATMEGA32U4  [QFN-44-NOPAD_1:1-LESS_PASTE]  88.9,57.66 315 top
U23  MIC5219  [SOT23-5]  107.43,65.54 90 top
U24  ATMEGA32U4  [QFN-44-NOPAD_1:1-LESS_PASTE]  107.19,57.66 315 top
U25  MIC5219  [SOT23-5]  15.99,102.37 90 top
U26  ATMEGA32U4  [QFN-44-NOPAD_1:1-LESS_PASTE]  15.75,94.49 315 top
U27  MIC5219  [SOT23-5]  34.28,102.37 90 top
U28  ATMEGA32U4  [QFN-44-NOPAD_1:1-LESS_PASTE]  34.04,94.49 315 top
U29  MIC5219  [SOT23-5]  52.57,102.37 90 top
U30  ATMEGA32U4  [QFN-44-NOPAD_1:1-LESS_PASTE]  52.32,94.49 315 top
U31  MIC5219  [SOT23-5]  70.86,102.37 90 top
U32  ATMEGA32U4  [QFN-44-NOPAD_1:1-LESS_PASTE]  70.61,94.49 315 top
U33  MIC5219  [SOT23-5]  89.15,102.37 90 top
U34  ATMEGA32U4  [QFN-44-NOPAD_1:1-LESS_PASTE]  88.9,94.49 315 top
U35  MIC5219  [SOT23-5]  107.43,102.37 90 top
U36  ATMEGA32U4  [QFN-44-NOPAD_1:1-LESS_PASTE]  107.19,94.49 315 top
U$1  LOGO-SFESK  [SFE-LOGO-FLAME]  23.88,37.59 90 top
U$2  LOGO-SFENEW  [SFE-NEW-WEBLOGO]  32.26,13.59 90 bottom
U$3  OSHW-LOGOS  [OSHW-LOGO-S]  10.92,23.37 90 bottom
U$4  LOGO-SFESK  [SFE-LOGO-FLAME]  42.16,37.59 90 top
U$5  OSHW-LOGOS  [OSHW-LOGO-S]  29.21,23.37 90 bottom
U$6  LOGO-SFENEW  [SFE-NEW-WEBLOGO]  50.55,13.59 90 bottom
U$7  LOGO-SFESK  [SFE-LOGO-FLAME]  60.45,37.59 90 top
U$8  OSHW-LOGOS  [OSHW-LOGO-S]  47.5,23.37 90 bottom
U$9  LOGO-SFENEW  [SFE-NEW-WEBLOGO]  68.83,13.59 90 bottom
U$10  LOGO-SFESK  [SFE-LOGO-FLAME]  78.74,37.59 90 top
U$11  LOGO-SFENEW  [SFE-NEW-WEBLOGO]  13.97,13.59 90 bottom
U$12  OSHW-LOGOS  [OSHW-LOGO-S]  65.79,23.37 90 bottom
U$13  LOGO-SFENEW  [SFE-NEW-WEBLOGO]  87.12,13.59 90 bottom
U$14  LOGO-SFESK  [SFE-LOGO-FLAME]  97.03,37.59 90 top
U$15  OSHW-LOGOS  [OSHW-LOGO-S]  84.07,23.37 90 bottom
U$16  LOGO-SFENEW  [SFE-NEW-WEBLOGO]  105.41,13.59 90 bottom
U$17  LOGO-SFESK  [SFE-LOGO-FLAME]  115.32,37.59 90 top
U$18  OSHW-LOGOS  [OSHW-LOGO-S]  102.36,23.37 90 bottom
U$19  LOGO-SFENEW  [SFE-NEW-WEBLOGO]  13.97,50.42 90 bottom
U$20  LOGO-SFESK  [SFE-LOGO-FLAME]  23.88,74.42 90 top
U$21  OSHW-LOGOS  [OSHW-LOGO-S]  10.92,60.2 90 bottom
U$22  LOGO-SFENEW  [SFE-NEW-WEBLOGO]  32.26,50.42 90 bottom
U$23  LOGO-SFESK  [SFE-LOGO-FLAME]  42.16,74.42 90 top
U$24  OSHW-LOGOS  [OSHW-LOGO-S]  29.21,60.2 90 bottom
U$25  LOGO-SFENEW  [SFE-NEW-WEBLOGO]  50.55,50.42 90 bottom
U$26  LOGO-SFESK  [SFE-LOGO-FLAME]  60.45,74.42 90 top
U$27  OSHW-LOGOS  [OSHW-LOGO-S]  47.5,60.2 90 bottom
U$28  LOGO-SFENEW  [SFE-NEW-WEBLOGO]  68.83,50.42 90 bottom
U$29  LOGO-SFESK  [SFE-LOGO-FLAME]  78.74,74.42 90 top
U$30  OSHW-LOGOS  [OSHW-LOGO-S]  65.79,60.2 90 bottom
U$31  LOGO-SFENEW  [SFE-NEW-WEBLOGO]  87.12,50.42 90 bottom
U$32  LOGO-SFESK  [SFE-LOGO-FLAME]  97.03,74.42 90 top
U$33  OSHW-LOGOS  [OSHW-LOGO-S]  84.07,60.2 90 bottom
U$34  LOGO-SFENEW  [SFE-NEW-WEBLOGO]  105.41,50.42 90 bottom
U$35  LOGO-SFESK  [SFE-LOGO-FLAME]  115.32,74.42 90 top
U$36  OSHW-LOGOS  [OSHW-LOGO-S]  102.36,60.2 90 bottom
U$37  LOGO-SFENEW  [SFE-NEW-WEBLOGO]  13.97,87.25 90 bottom
U$38  LOGO-SFESK  [SFE-LOGO-FLAME]  23.88,111.25 90 top
U$39  OSHW-LOGOS  [OSHW-LOGO-S]  10.92,97.03 90 bottom
U$40  LOGO-SFENEW  [SFE-NEW-WEBLOGO]  32.26,87.25 90 bottom
U$41  LOGO-SFESK  [SFE-LOGO-FLAME]  42.16,111.25 90 top
U$42  OSHW-LOGOS  [OSHW-LOGO-S]  29.21,97.03 90 bottom
U$43  LOGO-SFENEW  [SFE-NEW-WEBLOGO]  50.55,87.25 90 bottom
U$44  LOGO-SFESK  [SFE-LOGO-FLAME]  60.45,111.25 90 top
U$45  OSHW-LOGOS  [OSHW-LOGO-S]  47.5,97.03 90 bottom
U$46  LOGO-SFENEW  [SFE-NEW-WEBLOGO]  68.83,87.25 90 bottom
U$47  LOGO-SFESK  [SFE-LOGO-FLAME]  78.74,111.25 90 top
U$48  OSHW-LOGOS  [OSHW-LOGO-S]  65.79,97.03 90 bottom
U$49  LOGO-SFENEW  [SFE-NEW-WEBLOGO]  87.12,87.25 90 bottom
U$50  LOGO-SFESK  [SFE-LOGO-FLAME]  97.03,111.25 90 top
U$51  OSHW-LOGOS  [OSHW-LOGO-S]  84.07,97.03 90 bottom
U$52  LOGO-SFENEW  [SFE-NEW-WEBLOGO]  105.41,87.25 90 bottom
U$53  LOGO-SFESK  [SFE-LOGO-FLAME]  115.32,111.25 90 top
U$54  OSHW-LOGOS  [OSHW-LOGO-S]  102.36,97.03 90 bottom
X1  [USB-AB-MICRO-SMD-V03-IN&OUT]  15.75,38.61 270 top
X2  [USB-AB-MICRO-SMD-V03-IN&OUT]  34.04,38.61 270 top
X3  [USB-AB-MICRO-SMD-V03-IN&OUT]  52.32,38.61 270 top
X4  [USB-AB-MICRO-SMD-V03-IN&OUT]  70.61,38.61 270 top
X5  [USB-AB-MICRO-SMD-V03-IN&OUT]  88.9,38.61 270 top
X6  [USB-AB-MICRO-SMD-V03-IN&OUT]  107.19,38.61 270 top
X7  [USB-AB-MICRO-SMD-V03-IN&OUT]  15.75,75.44 270 top
X8  [USB-AB-MICRO-SMD-V03-IN&OUT]  34.04,75.44 270 top
X9  [USB-AB-MICRO-SMD-V03-IN&OUT]  52.32,75.44 270 top
X10  [USB-AB-MICRO-SMD-V03-IN&OUT]  70.61,75.44 270 top
X11  [USB-AB-MICRO-SMD-V03-IN&OUT]  88.9,75.44 270 top
X12  [USB-AB-MICRO-SMD-V03-IN&OUT]  107.19,75.44 270 top
X13  [USB-AB-MICRO-SMD-V03-IN&OUT]  15.75,112.27 270 top
X14  [USB-AB-MICRO-SMD-V03-IN&OUT]  34.04,112.27 270 top
X15  [USB-AB-MICRO-SMD-V03-IN&OUT]  52.32,112.27 270 top
X16  [USB-AB-MICRO-SMD-V03-IN&OUT]  70.61,112.27 270 top
X17  [USB-AB-MICRO-SMD-V03-IN&OUT]  88.9,112.27 270 top
X18  [USB-AB-MICRO-SMD-V03-IN&OUT]  107.19,112.27 270 top
Y1  16MHz  [CRYSTAL-SMD-5X3]  15.75,9.02 0 top
Y2  16MHz  [CRYSTAL-SMD-5X3]  34.04,9.02 0 top
Y3  16MHz  [CRYSTAL-SMD-5X3]  52.32,9.02 0 top
Y4  16MHz  [CRYSTAL-SMD-5X3]  70.61,9.02 0 top
Y5  16MHz  [CRYSTAL-SMD-5X3]  88.9,9.02 0 top
Y6  16MHz  [CRYSTAL-SMD-5X3]  107.19,9.02 0 top
Y7  16MHz  [CRYSTAL-SMD-5X3]  15.75,45.85 0 top
Y8  16MHz  [CRYSTAL-SMD-5X3]  34.04,45.85 0 top
Y9  16MHz  [CRYSTAL-SMD-5X3]  52.32,45.85 0 top
Y10  16MHz  [CRYSTAL-SMD-5X3]  70.61,45.85 0 top
Y11  16MHz  [CRYSTAL-SMD-5X3]  88.9,45.85 0 top
Y12  16MHz  [CRYSTAL-SMD-5X3]  107.19,45.85 0 top
Y13  16MHz  [CRYSTAL-SMD-5X3]  15.75,82.68 0 top
Y14  16MHz  [CRYSTAL-SMD-5X3]  34.04,82.68 0 top
Y15  16MHz  [CRYSTAL-SMD-5X3]  52.32,82.68 0 top
Y16  16MHz  [CRYSTAL-SMD-5X3]  70.61,82.68 0 top
Y17  16MHz  [CRYSTAL-SMD-5X3]  88.9,82.68 0 top
Y18  16MHz  [CRYSTAL-SMD-5X3]  107.19,82.68 0 top

## Library data of the parts
C1-C162 D1-D54 F1-F18 JP1-JP72 LED1-LED18 R1-R108 SJ1-SJ18 U1 U2 U5 U7 U9 U11 U13 U15 U17 U19 U21 U23 U25 U27 U29 U31 U33 U35 U$1-U$54 Y1-Y18 = SparkFun
E$1 E$4 E$8 = SparkFun-Aesthetics
U3 U4 U6 U8 U10 U12 U14 U16 U18 U20 U22 U24 U26 U28 U30 U32 U34 U36 X1-X18 = Testing

## Nets
A0: JP6.8 U3.36
A1: JP6.7 U3.37
A2: JP6.6 U3.38
A3: JP6.5 U3.39
A4: U3.40
A5: U3.41
A6: U4.41
A7: U4.40
A8: JP3.5 U4.39
A9: JP3.6 U4.38
A10: JP3.7 U4.37
A11: JP3.8 U4.36
A12: U6.41
A13: U6.40
A14: JP9.5 U6.39
A15: JP9.6 U6.38
A16: JP9.7 U6.37
A17: JP9.8 U6.36
A18: U8.41
A19: U8.40
A20: JP13.5 U8.39
A21: JP13.6 U8.38
A22: JP13.7 U8.37
A23: JP13.8 U8.36
A24: U10.41
A25: U10.40
A26: JP17.5 U10.39
A27: JP17.6 U10.38
A28: JP17.7 U10.37
A29: JP17.8 U10.36
A30: U12.41
A31: U12.40
A32: JP21.5 U12.39
A33: JP21.6 U12.38
A34: JP21.7 U12.37
A35: JP21.8 U12.36
A36: U14.41
A37: U14.40
A38: JP25.5 U14.39
A39: JP25.6 U14.38
A40: JP25.7 U14.37
A41: JP25.8 U14.36
A42: U16.41
A43: U16.40
A44: JP29.5 U16.39
A45: JP29.6 U16.38
A46: JP29.7 U16.37
A47: JP29.8 U16.36
A48: U18.41
A49: U18.40
A50: JP33.5 U18.39
A51: JP33.6 U18.38
A52: JP33.7 U18.37
A53: JP33.8 U18.36
A54: U20.41
A55: U20.40
A56: JP37.5 U20.39
A57: JP37.6 U20.38
A58: JP37.7 U20.37
A59: JP37.8 U20.36
A60: U22.41
A61: U22.40
A62: JP41.5 U22.39
A63: JP41.6 U22.38
A64: JP41.7 U22.37
A65: JP41.8 U22.36
A66: U24.41
A67: U24.40
A68: JP45.5 U24.39
A69: JP45.6 U24.38
A70: JP45.7 U24.37
A71: JP45.8 U24.36
A72: U26.41
A73: U26.40
A74: JP49.5 U26.39
A75: JP49.6 U26.38
A76: JP49.7 U26.37
A77: JP49.8 U26.36
A78: U28.41
A79: U28.40
A80: JP53.5 U28.39
A81: JP53.6 U28.38
A82: JP53.7 U28.37
A83: JP53.8 U28.36
A84: U30.41
A85: U30.40
A86: JP57.5 U30.39
A87: JP57.6 U30.38
A88: JP57.7 U30.37
A89: JP57.8 U30.36
A90: U32.41
A91: U32.40
A92: JP61.5 U32.39
A93: JP61.6 U32.38
A94: JP61.7 U32.37
A95: JP61.8 U32.36
A96: U34.41
A97: U34.40
A98: JP65.5 U34.39
A99: JP65.6 U34.38
A100: JP65.7 U34.37
A101: JP65.8 U34.36
A102: U36.41
A103: U36.40
A104: JP69.5 U36.39
A105: JP69.6 U36.38
A106: JP69.7 U36.37
A107: JP69.8 U36.36
AREF: C1.2 U3.42
AREF1: C11.2 U4.42
AREF2: C22.2 U6.42
AREF3: C31.2 U8.42
AREF4: C40.2 U10.42
AREF5: C49.2 U12.42
AREF6: C58.2 U14.42
AREF7: C67.2 U16.42
AREF8: C76.2 U18.42
AREF9: C85.2 U20.42
AREF10: C94.2 U22.42
AREF11: C103.2 U24.42
AREF12: C112.2 U26.42
AREF13: C121.2 U28.42
AREF14: C130.2 U30.42
AREF15: C139.2 U32.42
AREF16: C148.2 U34.42
AREF17: C157.2 U36.42
D1: JP4.1 U4.29
D2: JP7.8 U3.19
D3: JP7.7 U3.18
D4: JP7.6 U3.25
D5: JP7.5 U3.31
D6: JP7.4 U3.27
D7: JP7.3 U3.1
D8: JP7.2 U3.28
D9: JP7.1 U3.29
D10: JP6.12 U3.30
D11: U3.12
D12: U3.26
D13: U3.32
D14: R4.1 U3.8
D15: JP4.2 U4.28
D16: JP4.8 U4.19
D17: JP4.7 U4.18
D18: JP4.6 U4.25
D19: JP4.5 U4.31
D20: JP4.4 U4.27
D21: JP4.3 U4.1
D22: JP3.12 U4.30
D23: U4.12
D24: U4.26
D25: U4.32
D26: R9.1 U4.8
D27: JP10.1 U6.29
D28: JP10.2 U6.28
D29: JP10.8 U6.19
D30: JP10.7 U6.18
D31: JP10.6 U6.25
D32: JP10.5 U6.31
D33: JP10.4 U6.27
D34: JP10.3 U6.1
D35: JP9.12 U6.30
D36: U6.12
D37: U6.26
D38: U6.32
D39: R16.1 U6.8
D40: JP14.1 U8.29
D41: JP14.2 U8.28
D42: JP14.8 U8.19
D43: JP14.7 U8.18
D44: JP14.6 U8.25
D45: JP14.5 U8.31
D46: JP14.4 U8.27
D47: JP14.3 U8.1
D48: JP13.12 U8.30
D49: U8.12
D50: U8.26
D51: U8.32
D52: R22.1 U8.8
D53: JP18.1 U10.29
D54: JP18.2 U10.28
D55: JP18.8 U10.19
D56: JP18.7 U10.18
D57: JP18.6 U10.25
D58: JP18.5 U10.31
D59: JP18.4 U10.27
D60: JP18.3 U10.1
D61: JP17.12 U10.30
D62: U10.12
D63: U10.26
D64: U10.32
D65: R28.1 U10.8
D66: JP22.1 U12.29
D67: JP22.2 U12.28
D68: JP22.8 U12.19
D69: JP22.7 U12.18
D70: JP22.6 U12.25
D71: JP22.5 U12.31
D72: JP22.4 U12.27
D73: JP22.3 U12.1
D74: JP21.12 U12.30
D75: U12.12
D76: U12.26
D77: U12.32
D78: R34.1 U12.8
D79: JP26.1 U14.29
D80: JP26.2 U14.28
D81: JP26.8 U14.19
D82: JP26.7 U14.18
D83: JP26.6 U14.25
D84: JP26.5 U14.31
D85: JP26.4 U14.27
D86: JP26.3 U14.1
D87: JP25.12 U14.30
D88: U14.12
D89: U14.26
D90: U14.32
D91: R40.1 U14.8
D92: JP30.1 U16.29
D93: JP30.2 U16.28
D94: JP30.8 U16.19
D95: JP30.7 U16.18
D96: JP30.6 U16.25
D97: JP30.5 U16.31
D98: JP30.4 U16.27
D99: JP30.3 U16.1
D100: JP29.12 U16.30
D101: U16.12
D102: U16.26
D103: U16.32
D104: R46.1 U16.8
D105: JP34.1 U18.29
D106: JP34.2 U18.28
D107: JP34.8 U18.19
D108: JP34.7 U18.18
D109: JP34.6 U18.25
D110: JP34.5 U18.31
D111: JP34.4 U18.27
D112: JP34.3 U18.1
D113: JP33.12 U18.30
D114: U18.12
D115: U18.26
D116: U18.32
D117: R52.1 U18.8
D118: JP38.1 U20.29
D119: JP38.2 U20.28
D120: JP38.8 U20.19
D121: JP38.7 U20.18
D122: JP38.6 U20.25
D123: JP38.5 U20.31
D124: JP38.4 U20.27
D125: JP38.3 U20.1
D126: JP37.12 U20.30
D127: U20.12
D128: U20.26
D129: U20.32
D130: R58.1 U20.8
D131: JP42.1 U22.29
D132: JP42.2 U22.28
D133: JP42.8 U22.19
D134: JP42.7 U22.18
D135: JP42.6 U22.25
D136: JP42.5 U22.31
D137: JP42.4 U22.27
D138: JP42.3 U22.1
D139: JP41.12 U22.30
D140: U22.12
D141: U22.26
D142: U22.32
D143: R64.1 U22.8
D144: JP46.1 U24.29
D145: JP46.2 U24.28
D146: JP46.8 U24.19
D147: JP46.7 U24.18
D148: JP46.6 U24.25
D149: JP46.5 U24.31
D150: JP46.4 U24.27
D151: JP46.3 U24.1
D152: JP45.12 U24.30
D153: U24.12
D154: U24.26
D155: U24.32
D156: R70.1 U24.8
D157: JP50.1 U26.29
D158: JP50.2 U26.28
D159: JP50.8 U26.19
D160: JP50.7 U26.18
D161: JP50.6 U26.25
D162: JP50.5 U26.31
D163: JP50.4 U26.27
D164: JP50.3 U26.1
D165: JP49.12 U26.30
D166: U26.12
D167: U26.26
D168: U26.32
D169: R76.1 U26.8
D170: JP54.1 U28.29
D171: JP54.2 U28.28
D172: JP54.8 U28.19
D173: JP54.7 U28.18
D174: JP54.6 U28.25
D175: JP54.5 U28.31
D176: JP54.4 U28.27
D177: JP54.3 U28.1
D178: JP53.12 U28.30
D179: U28.12
D180: U28.26
D181: U28.32
D182: R82.1 U28.8
D183: JP58.1 U30.29
D184: JP58.2 U30.28
D185: JP58.8 U30.19
D186: JP58.7 U30.18
D187: JP58.6 U30.25
D188: JP58.5 U30.31
D189: JP58.4 U30.27
D190: JP58.3 U30.1
D191: JP57.12 U30.30
D192: U30.12
D193: U30.26
D194: U30.32
D195: R88.1 U30.8
D196: JP62.1 U32.29
D197: JP62.2 U32.28
D198: JP62.8 U32.19
D199: JP62.7 U32.18
D200: JP62.6 U32.25
D201: JP62.5 U32.31
D202: JP62.4 U32.27
D203: JP62.3 U32.1
D204: JP61.12 U32.30
D205: U32.12
D206: U32.26
D207: U32.32
D208: R94.1 U32.8
D209: JP66.1 U34.29
D210: JP66.2 U34.28
D211: JP66.8 U34.19
D212: JP66.7 U34.18
D213: JP66.6 U34.25
D214: JP66.5 U34.31
D215: JP66.4 U34.27
D216: JP66.3 U34.1
D217: JP65.12 U34.30
D218: U34.12
D219: U34.26
D220: U34.32
D221: R100.1 U34.8
D222: JP70.1 U36.29
D223: JP70.2 U36.28
D224: JP70.8 U36.19
D225: JP70.7 U36.18
D226: JP70.6 U36.25
D227: JP70.5 U36.31
D228: JP70.4 U36.27
D229: JP70.3 U36.1
D230: JP69.12 U36.30
D231: U36.12
D232: U36.26
D233: U36.32
D234: R106.1 U36.8
D+: R5.1 U3.4
D+1: R10.1 U4.4
D+2: R17.1 U6.4
D+3: R23.1 U8.4
D+4: R29.1 U10.4
D+5: R35.1 U12.4
D+6: R41.1 U14.4
D+7: R47.1 U16.4
D+8: R53.1 U18.4
D+9: R59.1 U20.4
D+10: R65.1 U22.4
D+11: R71.1 U24.4
D+12: R77.1 U26.4
D+13: R83.1 U28.4
D+14: R89.1 U30.4
D+15: R95.1 U32.4
D+16: R101.1 U34.4
D+17: R107.1 U36.4
D-: R7.1 U3.3
D-1: R12.1 U4.3
D-2: R18.1 U6.3
D-3: R24.1 U8.3
D-4: R30.1 U10.3
D-5: R36.1 U12.3
D-6: R42.1 U14.3
D-7: R48.1 U16.3
D-8: R54.1 U18.3
D-9: R60.1 U20.3
D-10: R66.1 U22.3
D-11: R72.1 U24.3
D-12: R78.1 U26.3
D-13: R84.1 U28.3
D-14: R90.1 U30.3
D-15: R96.1 U32.3
D-16: R102.1 U34.3
D-17: R108.1 U36.3
GND [vcc]: C1.1 C2.2 C3.1 C4.2 C5.1 C6.1 C10.2 C13.C C19.C JP6.2 JP7.9 JP7.10 LED1.C U2.2 U3.5 U3.15 U3.23 U3.33 U3.35 U3.43 X1.GND1
GND1 [vcc]: C7.2 C8.C C9.1 C11.1 C12.C C14.2 C15.2 C16.1 C17.1 JP3.2 JP4.9 JP4.10 LED2.C U1.2 U4.5 U4.15 U4.23 U4.33 U4.35 U4.43 X2.GND1
GND2 [vcc]: C18.2 C20.C C21.1 C22.1 C23.C C24.2 C25.2 C26.1 C27.1 JP9.2 JP10.9 JP10.10 LED3.C U5.2 U6.5 U6.15 U6.23 U6.33 U6.35 U6.43 X3.GND1
GND3 [vcc]: C28.2 C29.C C30.1 C31.1 C32.C C33.2 C34.2 C35.1 C36.1 JP13.2 JP14.9 JP14.10 LED4.C U7.2 U8.5 U8.15 U8.23 U8.33 U8.35 U8.43 X4.GND1
GND4 [vcc]: C37.2 C38.C C39.1 C40.1 C41.C C42.2 C43.2 C44.1 C45.1 JP17.2 JP18.9 JP18.10 LED5.C U9.2 U10.5 U10.15 U10.23 U10.33 U10.35 U10.43 X5.GND1
GND5 [vcc]: C46.2 C47.C C48.1 C49.1 C50.C C51.2 C52.2 C53.1 C54.1 JP21.2 JP22.9 JP22.10 LED6.C U11.2 U12.5 U12.15 U12.23 U12.33 U12.35 U12.43 X6.GND1
GND6 [vcc]: C55.2 C56.C C57.1 C58.1 C59.C C60.2 C61.2 C62.1 C63.1 JP25.2 JP26.9 JP26.10 LED7.C U13.2 U14.5 U14.15 U14.23 U14.33 U14.35 U14.43 X7.GND1
GND7 [vcc]: C64.2 C65.C C66.1 C67.1 C68.C C69.2 C70.2 C71.1 C72.1 JP29.2 JP30.9 JP30.10 LED8.C U15.2 U16.5 U16.15 U16.23 U16.33 U16.35 U16.43 X8.GND1
GND8 [vcc]: C73.2 C74.C C75.1 C76.1 C77.C C78.2 C79.2 C80.1 C81.1 JP33.2 JP34.9 JP34.10 LED9.C U17.2 U18.5 U18.15 U18.23 U18.33 U18.35 U18.43 X9.GND1
GND9 [vcc]: C82.2 C83.C C84.1 C85.1 C86.C C87.2 C88.2 C89.1 C90.1 JP37.2 JP38.9 JP38.10 LED10.C U19.2 U20.5 U20.15 U20.23 U20.33 U20.35 U20.43 X10.GND1
GND10 [vcc]: C91.2 C92.C C93.1 C94.1 C95.C C96.2 C97.2 C98.1 C99.1 JP41.2 JP42.9 JP42.10 LED11.C U21.2 U22.5 U22.15 U22.23 U22.33 U22.35 U22.43 X11.GND1
GND11 [vcc]: C100.2 C101.C C102.1 C103.1 C104.C C105.2 C106.2 C107.1 C108.1 JP45.2 JP46.9 JP46.10 LED12.C U23.2 U24.5 U24.15 U24.23 U24.33 U24.35 U24.43 X12.GND1
GND12 [vcc]: C109.2 C110.C C111.1 C112.1 C113.C C114.2 C115.2 C116.1 C117.1 JP49.2 JP50.9 JP50.10 LED13.C U25.2 U26.5 U26.15 U26.23 U26.33 U26.35 U26.43 X13.GND1
GND13 [vcc]: C118.2 C119.C C120.1 C121.1 C122.C C123.2 C124.2 C125.1 C126.1 JP53.2 JP54.9 JP54.10 LED14.C U27.2 U28.5 U28.15 U28.23 U28.33 U28.35 U28.43 X14.GND1
GND14 [vcc]: C127.2 C128.C C129.1 C130.1 C131.C C132.2 C133.2 C134.1 C135.1 JP57.2 JP58.9 JP58.10 LED15.C U29.2 U30.5 U30.15 U30.23 U30.33 U30.35 U30.43 X15.GND1
GND15 [vcc]: C136.2 C137.C C138.1 C139.1 C140.C C141.2 C142.2 C143.1 C144.1 JP61.2 JP62.9 JP62.10 LED16.C U31.2 U32.5 U32.15 U32.23 U32.33 U32.35 U32.43 X16.GND1
GND16 [vcc]: C145.2 C146.C C147.1 C148.1 C149.C C150.2 C151.2 C152.1 C153.1 JP65.2 JP66.9 JP66.10 LED17.C U33.2 U34.5 U34.15 U34.23 U34.33 U34.35 U34.43 X17.GND1
GND17 [vcc]: C154.2 C155.C C156.1 C157.1 C158.C C159.2 C160.2 C161.1 C162.1 JP69.2 JP70.9 JP70.10 LED18.C U35.2 U36.5 U36.15 U36.23 U36.33 U36.35 U36.43 X18.GND1
MISO: JP6.10 U3.11
MISO1: JP3.10 U4.11
MISO2: JP9.10 U6.11
MISO3: JP13.10 U8.11
MISO4: JP17.10 U10.11
MISO5: JP21.10 U12.11
MISO6: JP25.10 U14.11
MISO7: JP29.10 U16.11
MISO8: JP33.10 U18.11
MISO9: JP37.10 U20.11
MISO10: JP41.10 U22.11
MISO11: JP45.10 U24.11
MISO12: JP49.10 U26.11
MISO13: JP53.10 U28.11
MISO14: JP57.10 U30.11
MISO15: JP61.10 U32.11
MISO16: JP65.10 U34.11
MISO17: JP69.10 U36.11
MOSI: JP6.11 U3.10
MOSI1: JP3.11 U4.10
MOSI2: JP9.11 U6.10
MOSI3: JP13.11 U8.10
MOSI4: JP17.11 U10.10
MOSI5: JP21.11 U12.10
MOSI6: JP25.11 U14.10
MOSI7: JP29.11 U16.10
MOSI8: JP33.11 U18.10
MOSI9: JP37.11 U20.10
MOSI10: JP41.11 U22.10
MOSI11: JP45.11 U24.10
MOSI12: JP49.11 U26.10
MOSI13: JP53.11 U28.10
MOSI14: JP57.11 U30.10
MOSI15: JP61.11 U32.10
MOSI16: JP65.11 U34.10
MOSI17: JP69.11 U36.10
N$1: C4.1 U3.16 Y1.1
N$2: C2.1 U3.17 Y1.3
N$3: D2.2 F1.2 SJ1.1
N$4: C5.2 U3.6
N$5: D1.C R4.2
N$6: R7.2 X1.D-1
N$7: D3.C R6.2
N$8: R5.2 X1.D+1
N$9: LED2.A R1.1
N$10: C15.1 U4.16 Y2.1
N$11: C14.1 U4.17 Y2.3
N$12: C16.2 U4.6
N$13: R12.2 X2.D-1
N$14: R10.2 X2.D+1
N$15: D6.2 F2.2 SJ2.1
N$16: D5.C R9.2
N$17: D4.C R8.2
N$18: LED3.A R13.1
N$19: C25.1 U6.16 Y3.1
N$20: C24.1 U6.17 Y3.3
N$21: C26.2 U6.6
N$22: R18.2 X3.D-1
N$23: R17.2 X3.D+1
N$24: D9.2 F3.2 SJ3.1
N$25: D8.C R16.2
N$26: D7.C R15.2
N$27: LED4.A R19.1
N$28: C34.1 U8.16 Y4.1
N$29: C33.1 U8.17 Y4.3
N$30: C35.2 U8.6
N$31: R24.2 X4.D-1
N$32: R23.2 X4.D+1
N$33: D12.2 F4.2 SJ4.1
N$34: D11.C R22.2
N$35: D10.C R21.2
N$36: LED5.A R25.1
N$37: C43.1 U10.16 Y5.1
N$38: LED1.A R11.1
N$39: C42.1 U10.17 Y5.3
N$40: C44.2 U10.6
N$41: R30.2 X5.D-1
N$42: R29.2 X5.D+1
N$43: D15.2 F5.2 SJ5.1
N$44: D14.C R28.2
N$45: D13.C R27.2
N$46: LED6.A R31.1
N$47: C52.1 U12.16 Y6.1
N$48: C51.1 U12.17 Y6.3
N$49: C53.2 U12.6
N$50: R36.2 X6.D-1
N$51: R35.2 X6.D+1
N$52: D18.2 F6.2 SJ6.1
N$53: D17.C R34.2
N$54: D16.C R33.2
N$55: LED7.A R37.1
N$56: C61.1 U14.16 Y7.1
N$57: C60.1 U14.17 Y7.3
N$58: C62.2 U14.6
N$59: R42.2 X7.D-1
N$60: R41.2 X7.D+1
N$61: D21.2 F7.2 SJ7.1
N$62: D20.C R40.2
N$63: D19.C R39.2
N$64: LED8.A R43.1
N$65: C70.1 U16.16 Y8.1
N$66: C69.1 U16.17 Y8.3
N$67: C71.2 U16.6
N$68: R48.2 X8.D-1
N$69: R47.2 X8.D+1
N$70: D24.2 F8.2 SJ8.1
N$71: D23.C R46.2
N$72: D22.C R45.2
N$73: LED9.A R49.1
N$74: C79.1 U18.16 Y9.1
N$75: C78.1 U18.17 Y9.3
N$76: C80.2 U18.6
N$77: R54.2 X9.D-1
N$78: R53.2 X9.D+1
N$79: D27.2 F9.2 SJ9.1
N$80: D26.C R52.2
N$81: D25.C R51.2
N$82: LED10.A R55.1
N$83: C88.1 U20.16 Y10.1
N$84: C87.1 U20.17 Y10.3
N$85: C89.2 U20.6
N$86: R60.2 X10.D-1
N$87: R59.2 X10.D+1
N$88: D30.2 F10.2 SJ10.1
N$89: D29.C R58.2
N$90: D28.C R57.2
N$91: LED11.A R61.1
N$92: C97.1 U22.16 Y11.1
N$93: C96.1 U22.17 Y11.3
N$94: C98.2 U22.6
N$95: R66.2 X11.D-1
N$96: R65.2 X11.D+1
N$97: D33.2 F11.2 SJ11.1
N$98: D32.C R64.2
N$99: D31.C R63.2
N$100: LED12.A R67.1
N$101: C106.1 U24.16 Y12.1
N$102: C105.1 U24.17 Y12.3
N$103: C107.2 U24.6
N$104: R72.2 X12.D-1
N$105: R71.2 X12.D+1
N$106: D36.2 F12.2 SJ12.1
N$107: D35.C R70.2
N$108: D34.C R69.2
N$109: LED13.A R73.1
N$110: C115.1 U26.16 Y13.1
N$111: C114.1 U26.17 Y13.3
N$112: C116.2 U26.6
N$113: R78.2 X13.D-1
N$114: R77.2 X13.D+1
N$115: D39.2 F13.2 SJ13.1
N$116: D38.C R76.2
N$117: D37.C R75.2
N$118: LED14.A R79.1
N$119: C124.1 U28.16 Y14.1
N$120: C123.1 U28.17 Y14.3
N$121: C125.2 U28.6
N$122: R84.2 X14.D-1
N$123: R83.2 X14.D+1
N$124: D42.2 F14.2 SJ14.1
N$125: D41.C R82.2
N$126: D40.C R81.2
N$127: LED15.A R85.1
N$128: C133.1 U30.16 Y15.1
N$129: C132.1 U30.17 Y15.3
N$130: C134.2 U30.6
N$131: R90.2 X15.D-1
N$132: R89.2 X15.D+1
N$133: D45.2 F15.2 SJ15.1
N$134: D44.C R88.2
N$135: D43.C R87.2
N$136: LED16.A R91.1
N$137: C142.1 U32.16 Y16.1
N$138: C141.1 U32.17 Y16.3
N$139: C143.2 U32.6
N$140: R96.2 X16.D-1
N$141: R95.2 X16.D+1
N$142: D48.2 F16.2 SJ16.1
N$143: D47.C R94.2
N$144: D46.C R93.2
N$145: LED17.A R97.1
N$146: C151.1 U34.16 Y17.1
N$147: C150.1 U34.17 Y17.3
N$148: C152.2 U34.6
N$149: R102.2 X17.D-1
N$150: R101.2 X17.D+1
N$151: D51.2 F17.2 SJ17.1
N$152: D50.C R100.2
N$153: D49.C R99.2
N$154: LED18.A R103.1
N$155: C160.1 U36.16 Y18.1
N$156: C159.1 U36.17 Y18.3
N$157: C161.2 U36.6
N$158: R108.2 X18.D-1
N$159: R107.2 X18.D+1
N$160: D54.2 F18.2 SJ18.1
N$161: D53.C R106.2
N$162: D52.C R105.2
RAW [vcc]: C19.A D2.1 JP6.1 U2.1 U2.3
RAW1 [vcc]: C12.A D6.1 JP3.1 U1.1 U1.3
RAW2 [vcc]: C23.A D9.1 JP9.1 U5.1 U5.3
RAW3 [vcc]: C32.A D12.1 JP13.1 U7.1 U7.3
RAW4 [vcc]: C41.A D15.1 JP17.1 U9.1 U9.3
RAW5 [vcc]: C50.A D18.1 JP21.1 U11.1 U11.3
RAW6 [vcc]: C59.A D21.1 JP25.1 U13.1 U13.3
RAW7 [vcc]: C68.A D24.1 JP29.1 U15.1 U15.3
RAW8 [vcc]: C77.A D27.1 JP33.1 U17.1 U17.3
RAW9 [vcc]: C86.A D30.1 JP37.1 U19.1 U19.3
RAW10 [vcc]: C95.A D33.1 JP41.1 U21.1 U21.3
RAW11 [vcc]: C104.A D36.1 JP45.1 U23.1 U23.3
RAW12 [vcc]: C113.A D39.1 JP49.1 U25.1 U25.3
RAW13 [vcc]: C122.A D42.1 JP53.1 U27.1 U27.3
RAW14 [vcc]: C131.A D45.1 JP57.1 U29.1 U29.3
RAW15 [vcc]: C140.A D48.1 JP61.1 U31.1 U31.3
RAW16 [vcc]: C149.A D51.1 JP65.1 U33.1 U33.3
RAW17 [vcc]: C158.A D54.1 JP69.1 U35.1 U35.3
RESET: JP6.3 R2.1 U3.13
RESET1: JP3.3 R3.1 U4.13
RESET2: JP9.3 R14.1 U6.13
RESET3: JP13.3 R20.1 U8.13
RESET4: JP17.3 R26.1 U10.13
RESET5: JP21.3 R32.1 U12.13
RESET6: JP25.3 R38.1 U14.13
RESET7: JP29.3 R44.1 U16.13
RESET8: JP33.3 R50.1 U18.13
RESET9: JP37.3 R56.1 U20.13
RESET10: JP41.3 R62.1 U22.13
RESET11: JP45.3 R68.1 U24.13
RESET12: JP49.3 R74.1 U26.13
RESET13: JP53.3 R80.1 U28.13
RESET14: JP57.3 R86.1 U30.13
RESET15: JP61.3 R92.1 U32.13
RESET16: JP65.3 R98.1 U34.13
RESET17: JP69.3 R104.1 U36.13
RXI: JP7.11 U3.20
RXI1: JP4.11 U4.20
RXI2: JP10.11 U6.20
RXI3: JP14.11 U8.20
RXI4: JP18.11 U10.20
RXI5: JP22.11 U12.20
RXI6: JP26.11 U14.20
RXI7: JP30.11 U16.20
RXI8: JP34.11 U18.20
RXI9: JP38.11 U20.20
RXI10: JP42.11 U22.20
RXI11: JP46.11 U24.20
RXI12: JP50.11 U26.20
RXI13: JP54.11 U28.20
RXI14: JP58.11 U30.20
RXI15: JP62.11 U32.20
RXI16: JP66.11 U34.20
RXI17: JP70.11 U36.20
SCK: JP6.9 U3.9
SCK1: JP3.9 U4.9
SCK2: JP9.9 U6.9
SCK3: JP13.9 U8.9
SCK4: JP17.9 U10.9
SCK5: JP21.9 U12.9
SCK6: JP25.9 U14.9
SCK7: JP29.9 U16.9
SCK8: JP33.9 U18.9
SCK9: JP37.9 U20.9
SCK10: JP41.9 U22.9
SCK11: JP45.9 U24.9
SCK12: JP49.9 U26.9
SCK13: JP53.9 U28.9
SCK14: JP57.9 U30.9
SCK15: JP61.9 U32.9
SCK16: JP65.9 U34.9
SCK17: JP69.9 U36.9
TXLED: R6.1 U3.22
TXLED1: R8.1 U4.22
TXLED2: R15.1 U6.22
TXLED3: R21.1 U8.22
TXLED4: R27.1 U10.22
TXLED5: R33.1 U12.22
TXLED6: R39.1 U14.22
TXLED7: R45.1 U16.22
TXLED8: R51.1 U18.22
TXLED9: R57.1 U20.22
TXLED10: R63.1 U22.22
TXLED11: R69.1 U24.22
TXLED12: R75.1 U26.22
TXLED13: R81.1 U28.22
TXLED14: R87.1 U30.22
TXLED15: R93.1 U32.22
TXLED16: R99.1 U34.22
TXLED17: R105.1 U36.22
TXO: JP7.12 U3.21
TXO1: JP4.12 U4.21
TXO2: JP10.12 U6.21
TXO3: JP14.12 U8.21
TXO4: JP18.12 U10.21
TXO5: JP22.12 U12.21
TXO6: JP26.12 U14.21
TXO7: JP30.12 U16.21
TXO8: JP34.12 U18.21
TXO9: JP38.12 U20.21
TXO10: JP42.12 U22.21
TXO11: JP46.12 U24.21
TXO12: JP50.12 U26.21
TXO13: JP54.12 U28.21
TXO14: JP58.12 U30.21
TXO15: JP62.12 U32.21
TXO16: JP66.12 U34.21
TXO17: JP70.12 U36.21
UVCC: C6.2 F1.1 U3.2 U3.7 X1.VBUS1
UVCC1: C17.2 F2.1 U4.2 U4.7 X2.VBUS1
UVCC2: C27.2 F3.1 U6.2 U6.7 X3.VBUS1
UVCC3: C36.2 F4.1 U8.2 U8.7 X4.VBUS1
UVCC4: C45.2 F5.1 U10.2 U10.7 X5.VBUS1
UVCC5: C54.2 F6.1 U12.2 U12.7 X6.VBUS1
UVCC6: C63.2 F7.1 U14.2 U14.7 X7.VBUS1
UVCC7: C72.2 F8.1 U16.2 U16.7 X8.VBUS1
UVCC8: C81.2 F9.1 U18.2 U18.7 X9.VBUS1
UVCC9: C90.2 F10.1 U20.2 U20.7 X10.VBUS1
UVCC10: C99.2 F11.1 U22.2 U22.7 X11.VBUS1
UVCC11: C108.2 F12.1 U24.2 U24.7 X12.VBUS1
UVCC12: C117.2 F13.1 U26.2 U26.7 X13.VBUS1
UVCC13: C126.2 F14.1 U28.2 U28.7 X14.VBUS1
UVCC14: C135.2 F15.1 U30.2 U30.7 X15.VBUS1
UVCC15: C144.2 F16.1 U32.2 U32.7 X16.VBUS1
UVCC16: C153.2 F17.1 U34.2 U34.7 X17.VBUS1
UVCC17: C162.2 F18.1 U36.2 U36.7 X18.VBUS1
VCC: C3.2 C10.1 C13.A D1.A D3.A JP6.4 R2.2 R11.2 SJ1.2 U2.5 U3.14 U3.24 U3.34 U3.44
VCC1: C7.1 C8.A C9.2 D4.A D5.A JP3.4 R1.2 R3.2 SJ2.2 U1.5 U4.14 U4.24 U4.34 U4.44
VCC2: C18.1 C20.A C21.2 D7.A D8.A JP9.4 R13.2 R14.2 SJ3.2 U5.5 U6.14 U6.24 U6.34 U6.44
VCC3: C28.1 C29.A C30.2 D10.A D11.A JP13.4 R19.2 R20.2 SJ4.2 U7.5 U8.14 U8.24 U8.34 U8.44
VCC4: C37.1 C38.A C39.2 D13.A D14.A JP17.4 R25.2 R26.2 SJ5.2 U9.5 U10.14 U10.24 U10.34 U10.44
VCC5: C46.1 C47.A C48.2 D16.A D17.A JP21.4 R31.2 R32.2 SJ6.2 U11.5 U12.14 U12.24 U12.34 U12.44
VCC6: C55.1 C56.A C57.2 D19.A D20.A JP25.4 R37.2 R38.2 SJ7.2 U13.5 U14.14 U14.24 U14.34 U14.44
VCC7: C64.1 C65.A C66.2 D22.A D23.A JP29.4 R43.2 R44.2 SJ8.2 U15.5 U16.14 U16.24 U16.34 U16.44
VCC8: C73.1 C74.A C75.2 D25.A D26.A JP33.4 R49.2 R50.2 SJ9.2 U17.5 U18.14 U18.24 U18.34 U18.44
VCC9: C82.1 C83.A C84.2 D28.A D29.A JP37.4 R55.2 R56.2 SJ10.2 U19.5 U20.14 U20.24 U20.34 U20.44
VCC10: C91.1 C92.A C93.2 D31.A D32.A JP41.4 R61.2 R62.2 SJ11.2 U21.5 U22.14 U22.24 U22.34 U22.44
VCC11: C100.1 C101.A C102.2 D34.A D35.A JP45.4 R67.2 R68.2 SJ12.2 U23.5 U24.14 U24.24 U24.34 U24.44
VCC12: C109.1 C110.A C111.2 D37.A D38.A JP49.4 R73.2 R74.2 SJ13.2 U25.5 U26.14 U26.24 U26.34 U26.44
VCC13: C118.1 C119.A C120.2 D40.A D41.A JP53.4 R79.2 R80.2 SJ14.2 U27.5 U28.14 U28.24 U28.34 U28.44
VCC14: C127.1 C128.A C129.2 D43.A D44.A JP57.4 R85.2 R86.2 SJ15.2 U29.5 U30.14 U30.24 U30.34 U30.44
VCC15: C136.1 C137.A C138.2 D46.A D47.A JP61.4 R91.2 R92.2 SJ16.2 U31.5 U32.14 U32.24 U32.34 U32.44
VCC16: C145.1 C146.A C147.2 D49.A D50.A JP65.4 R97.2 R98.2 SJ17.2 U33.5 U34.14 U34.24 U34.34 U34.44
VCC17: C154.1 C155.A C156.2 D52.A D53.A JP69.4 R103.2 R104.2 SJ18.2 U35.5 U36.14 U36.24 U36.34 U36.44

## Tracks (layer width: path | path; a pad name or v marks a point on that pad's centre or on a via)
A0
  Top 0.203: U3.36 20.39,23.38 21.47,23.38 21.64,23.2 21.64,22.8 22.13,22.3 22.13,19.53 JP6.8
A1
  Top 0.203: U3.37 20.12,23.8 21.77,23.8 22.13,23.45 22.13,22.86 23.37,21.62 JP6.7
A2
  Top 0.203: U3.38 19.84,24.22 22.52,24.22 JP6.6
A3
  Top 0.203: 19.54,24.62 19.55,24.62 | 18.46,23.54 19.55,24.62 | 19.55,24.62 22.08,24.62 JP6.5
A8
  Top 0.203: 37.83,24.62 | 36.74,23.54 37.83,24.62 | 37.83,24.62 40.37,24.62 41.65,25.91 JP3.5
A9
  Top 0.203: U4.38 38.13,24.22 40.8,24.22 JP3.6
A10
  Top 0.203: U4.37 38.41,23.8 40.06,23.8 40.41,23.45 40.41,22.86 41.66,21.62 JP3.7
A11
  Top 0.203: U4.36 38.67,23.38 39.75,23.38 39.92,23.2 39.92,22.8 40.42,22.3 40.42,19.53 JP3.8
A14
  Top 0.203: 56.11,24.62 56.12,24.62 | 55.03,23.54 56.12,24.62 | 56.12,24.62 58.65,24.62 JP9.5
A15